# Altium PCB ignatova_telemetry_board.PcbDoc (part 1 of 2)
Units mm, origin at the board's own origin, x right, y up, seen from the top; angles counter-clockwise.
Board outline 105.78 x 126.4 mm, 4 copper layers (Top Layer, Signal Layer 1, Signal Layer 2, Bottom Layer), stack 1.556 mm thick; 56 components, 51 nets, 286 pads, 699 vias.
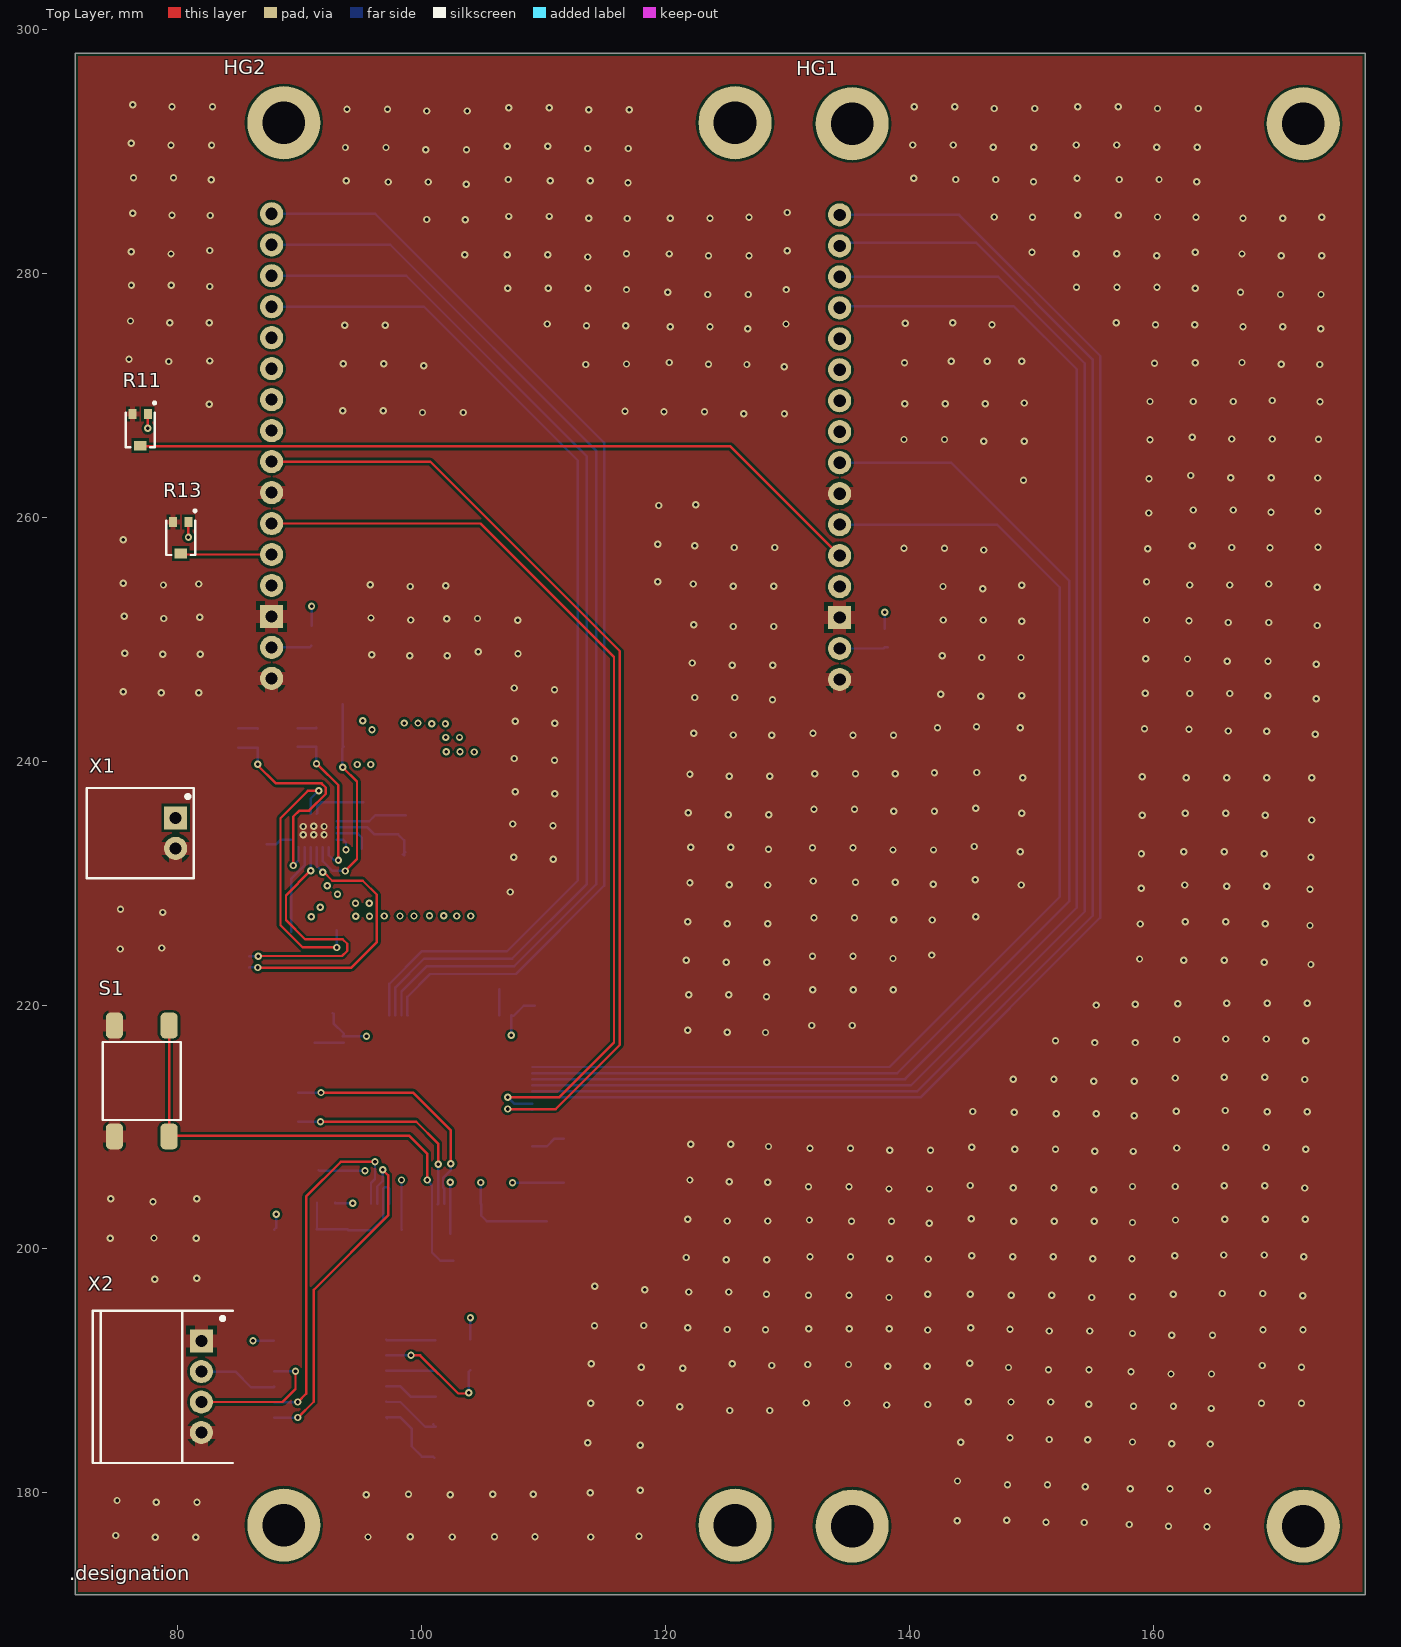
[diagram p0: Top Layer view]
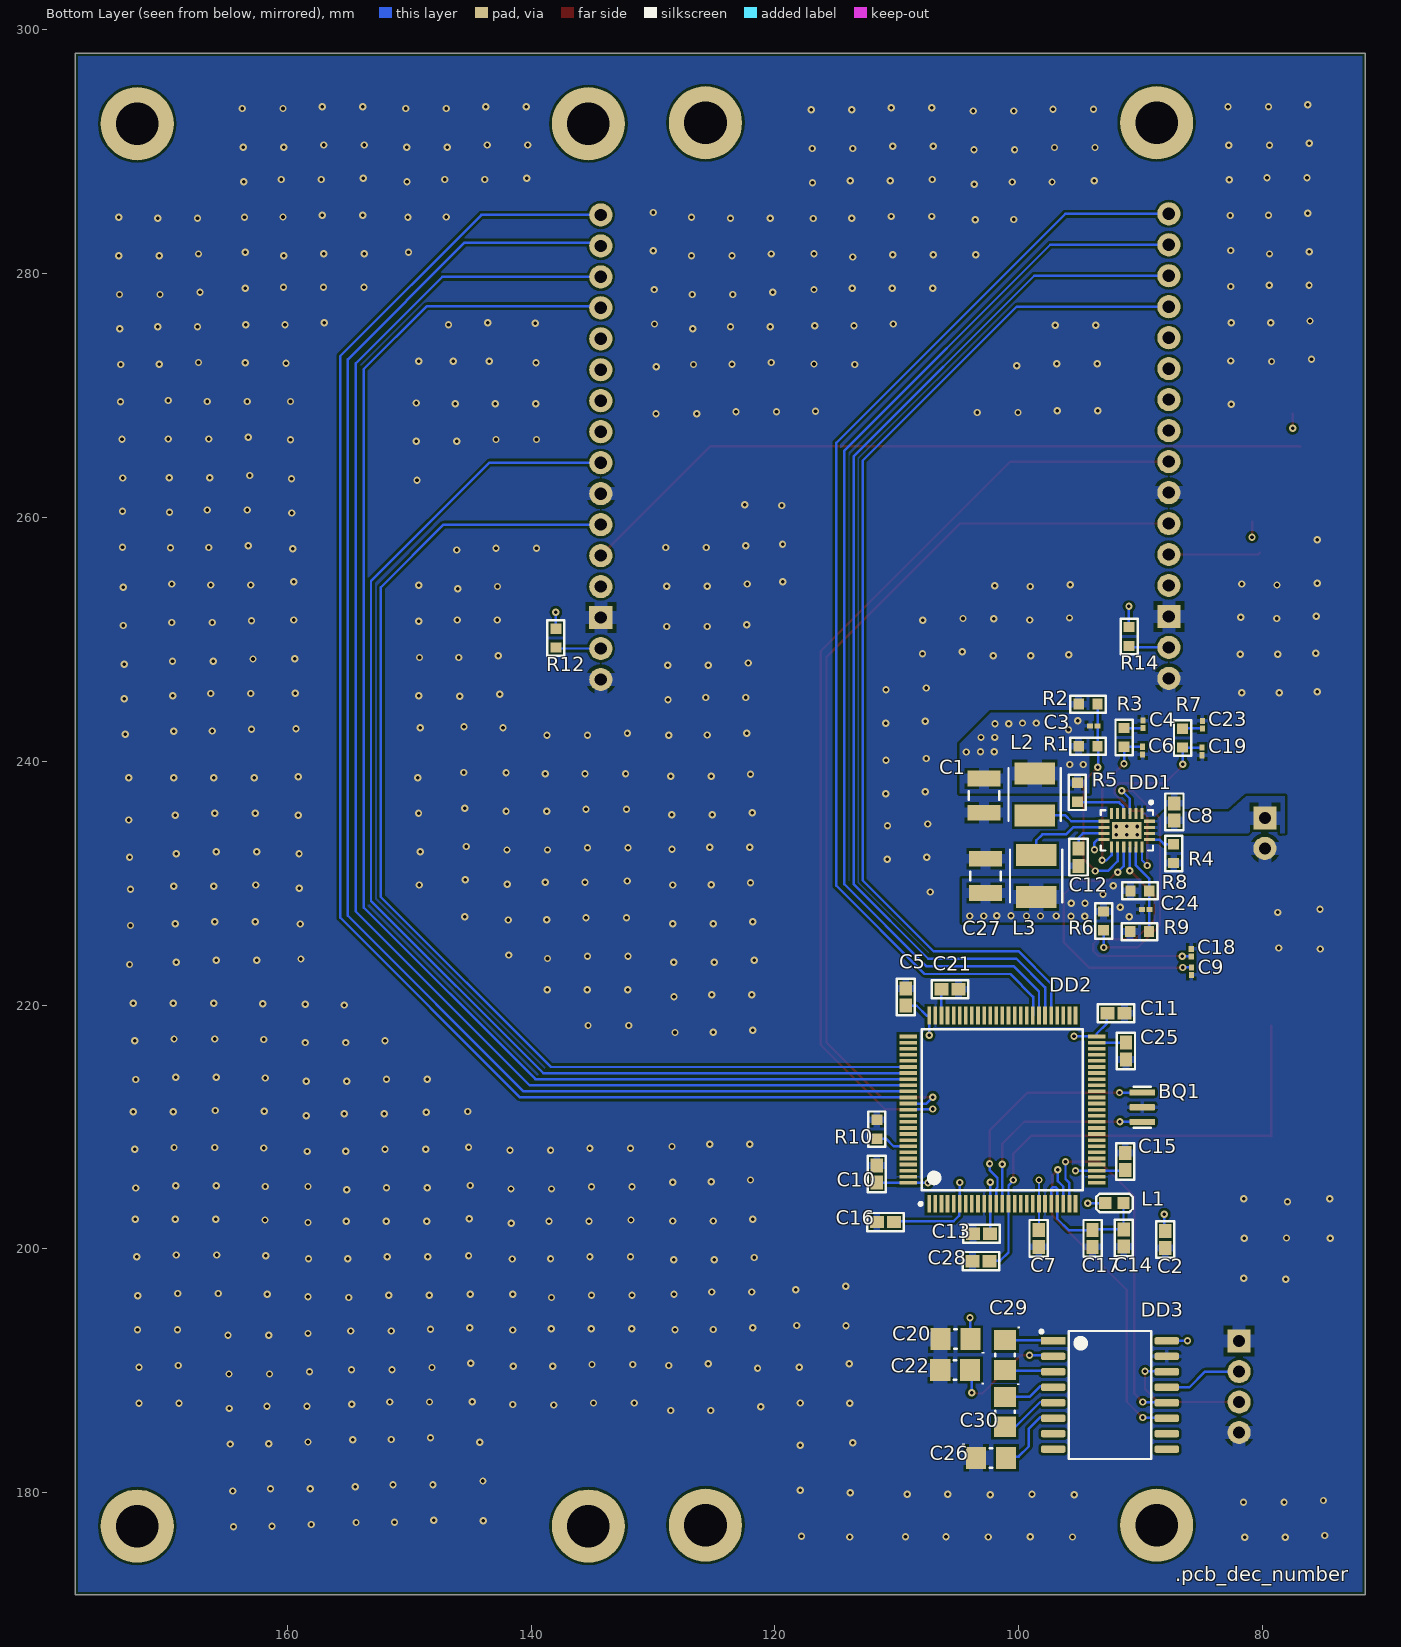
[diagram p1: Bottom Layer view, seen from below]
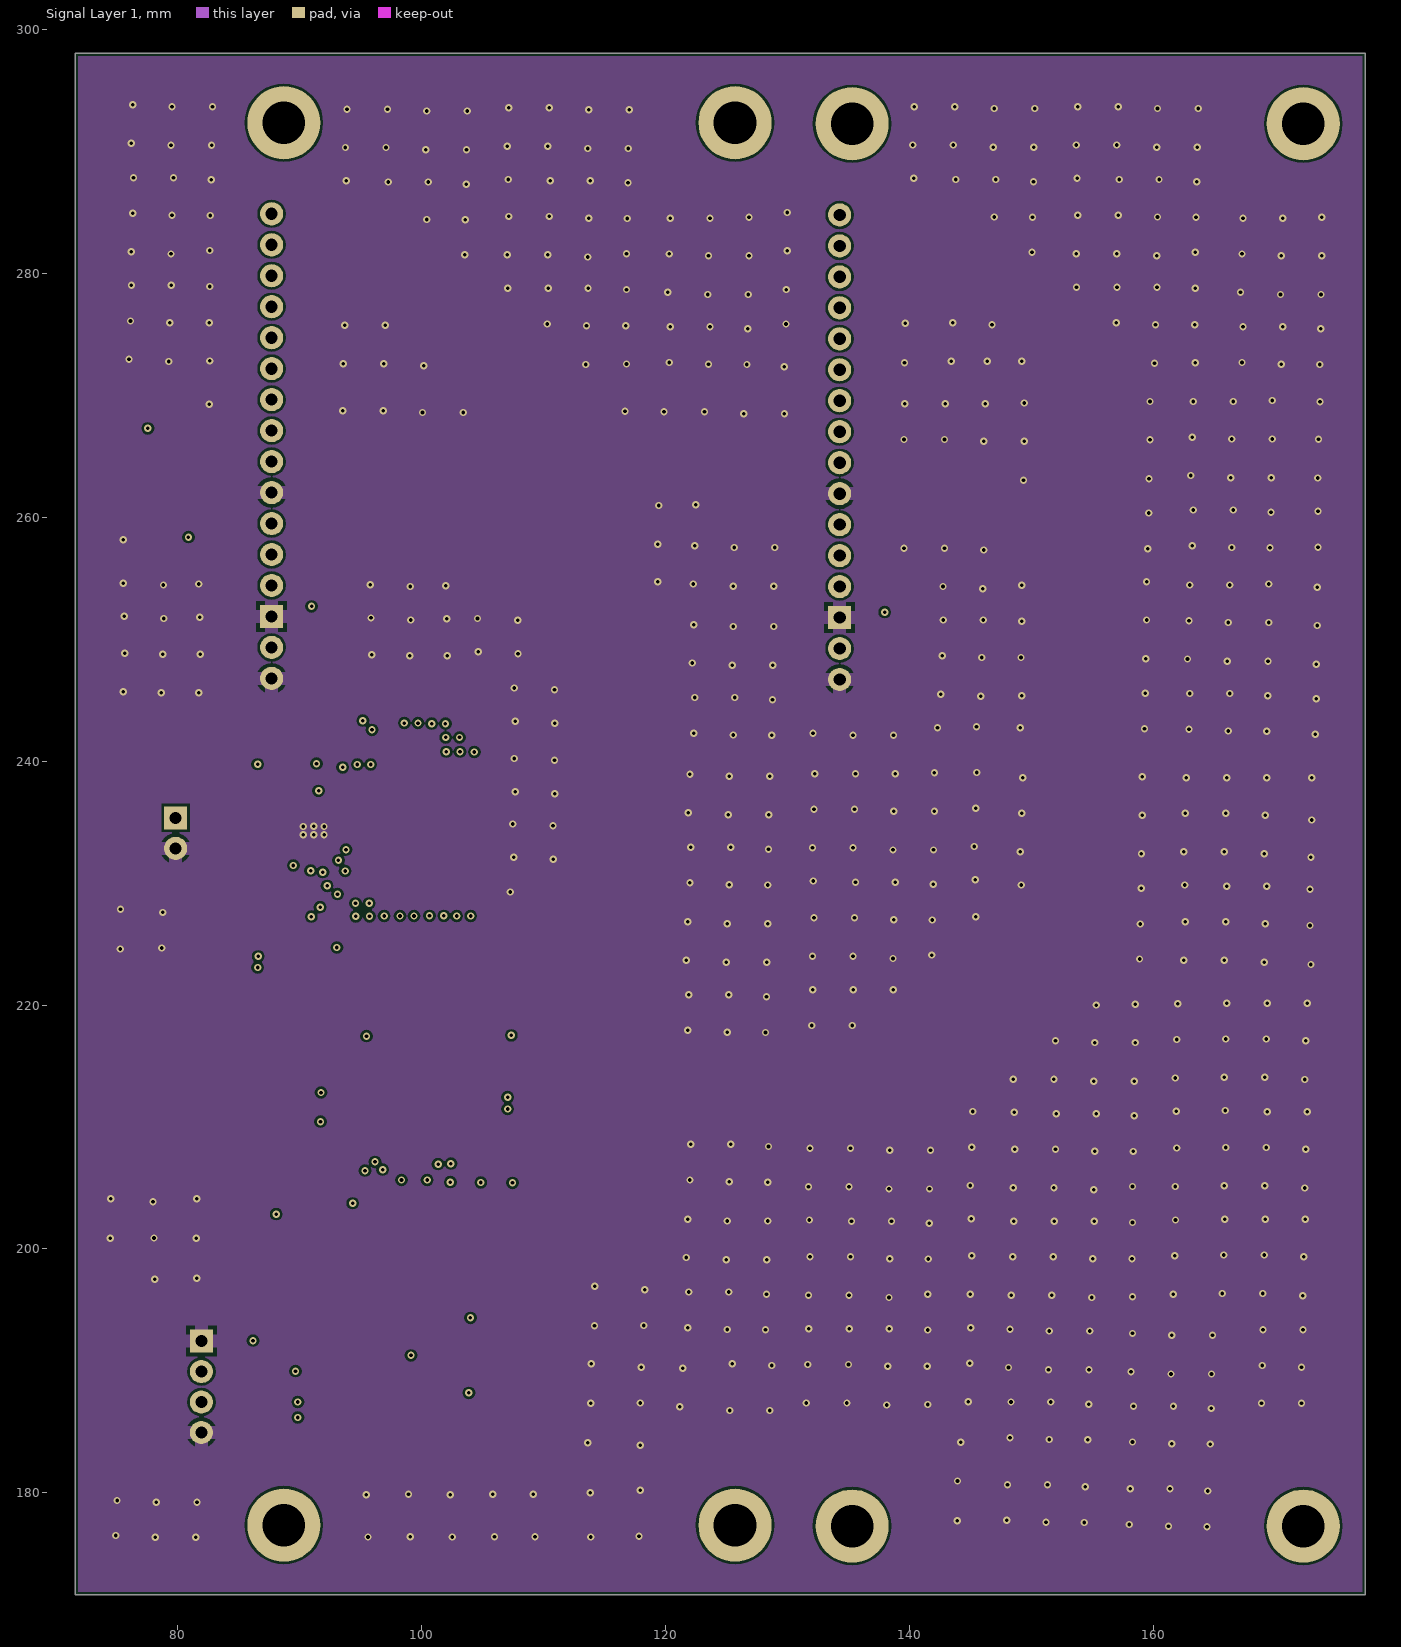
[diagram p2: Signal Layer 1]
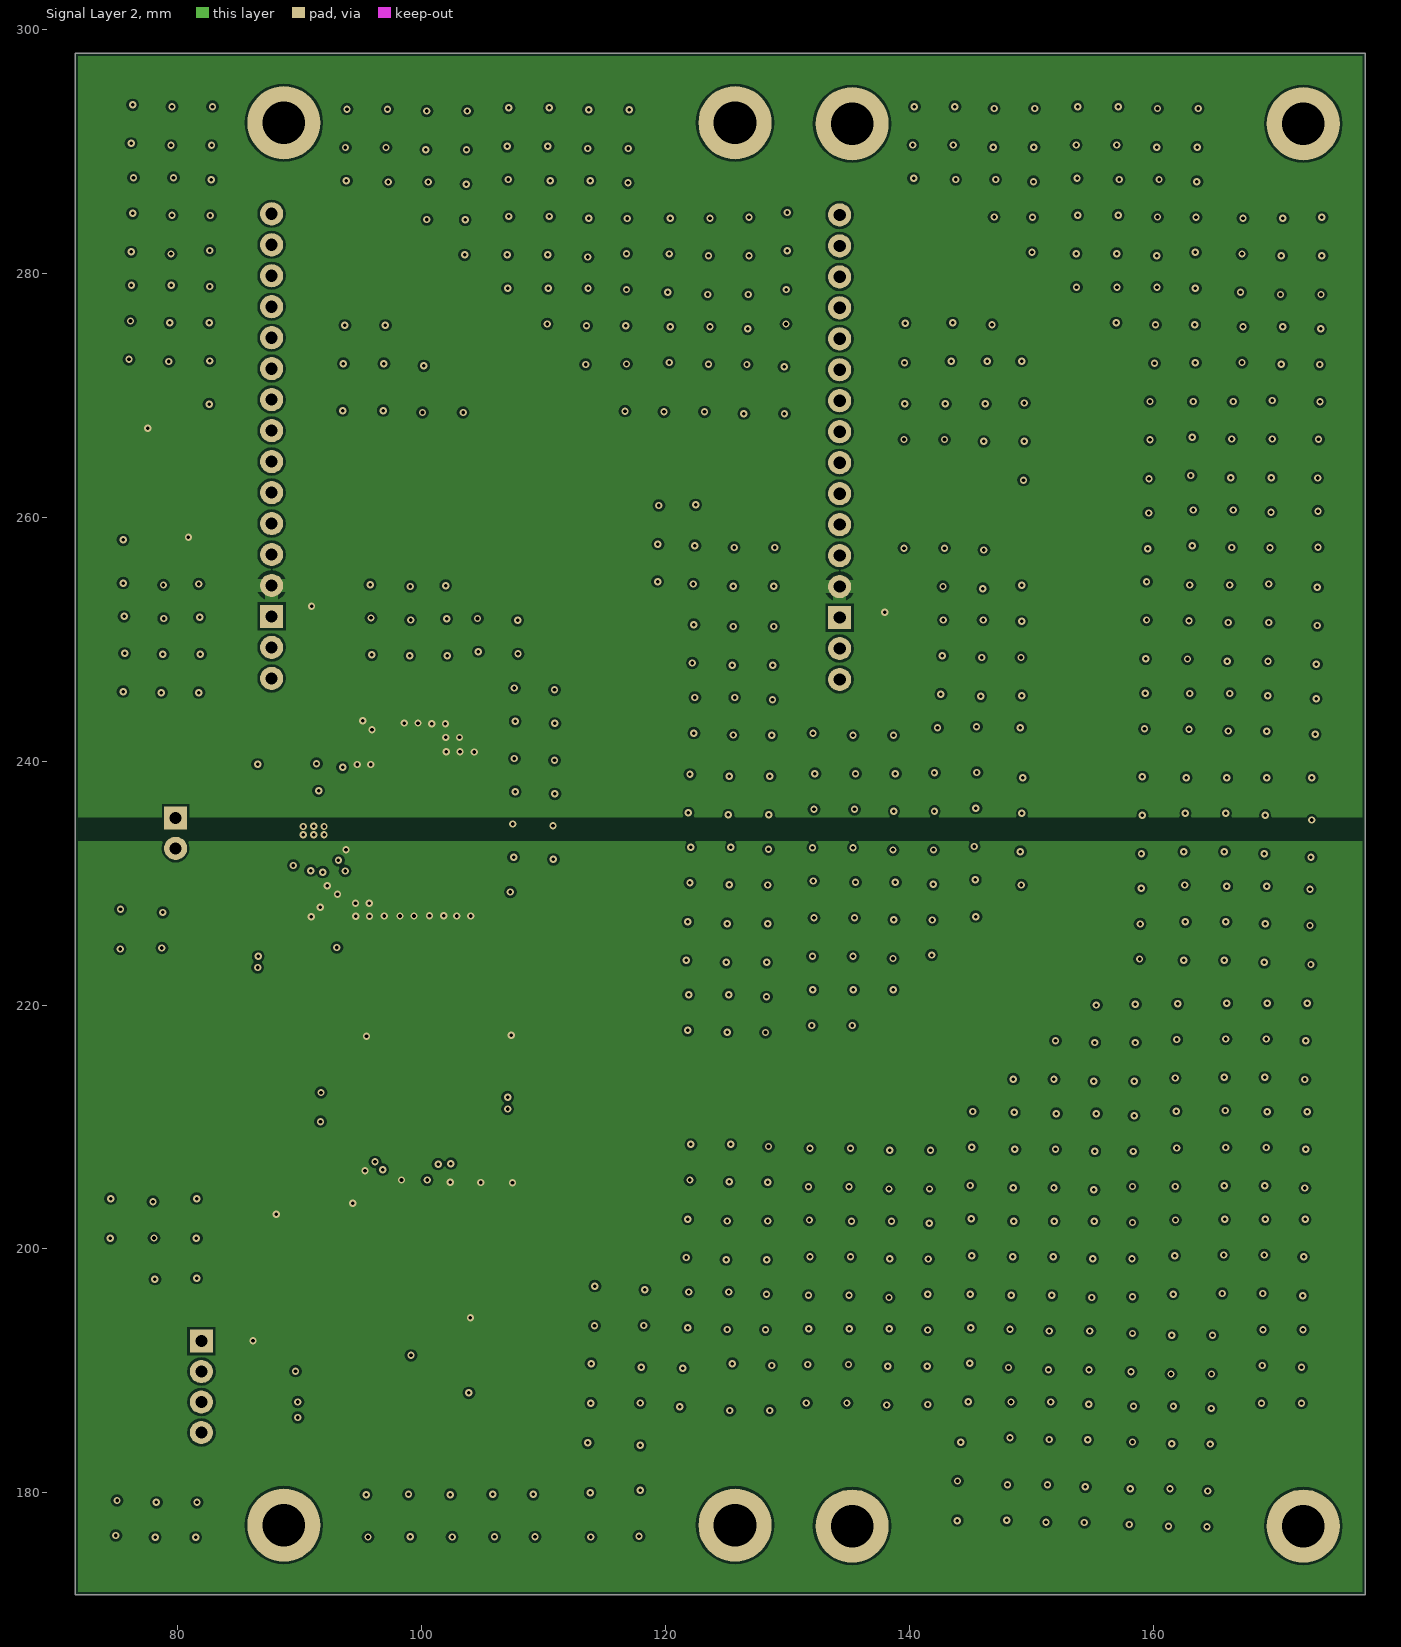
[diagram p3: Signal Layer 2]
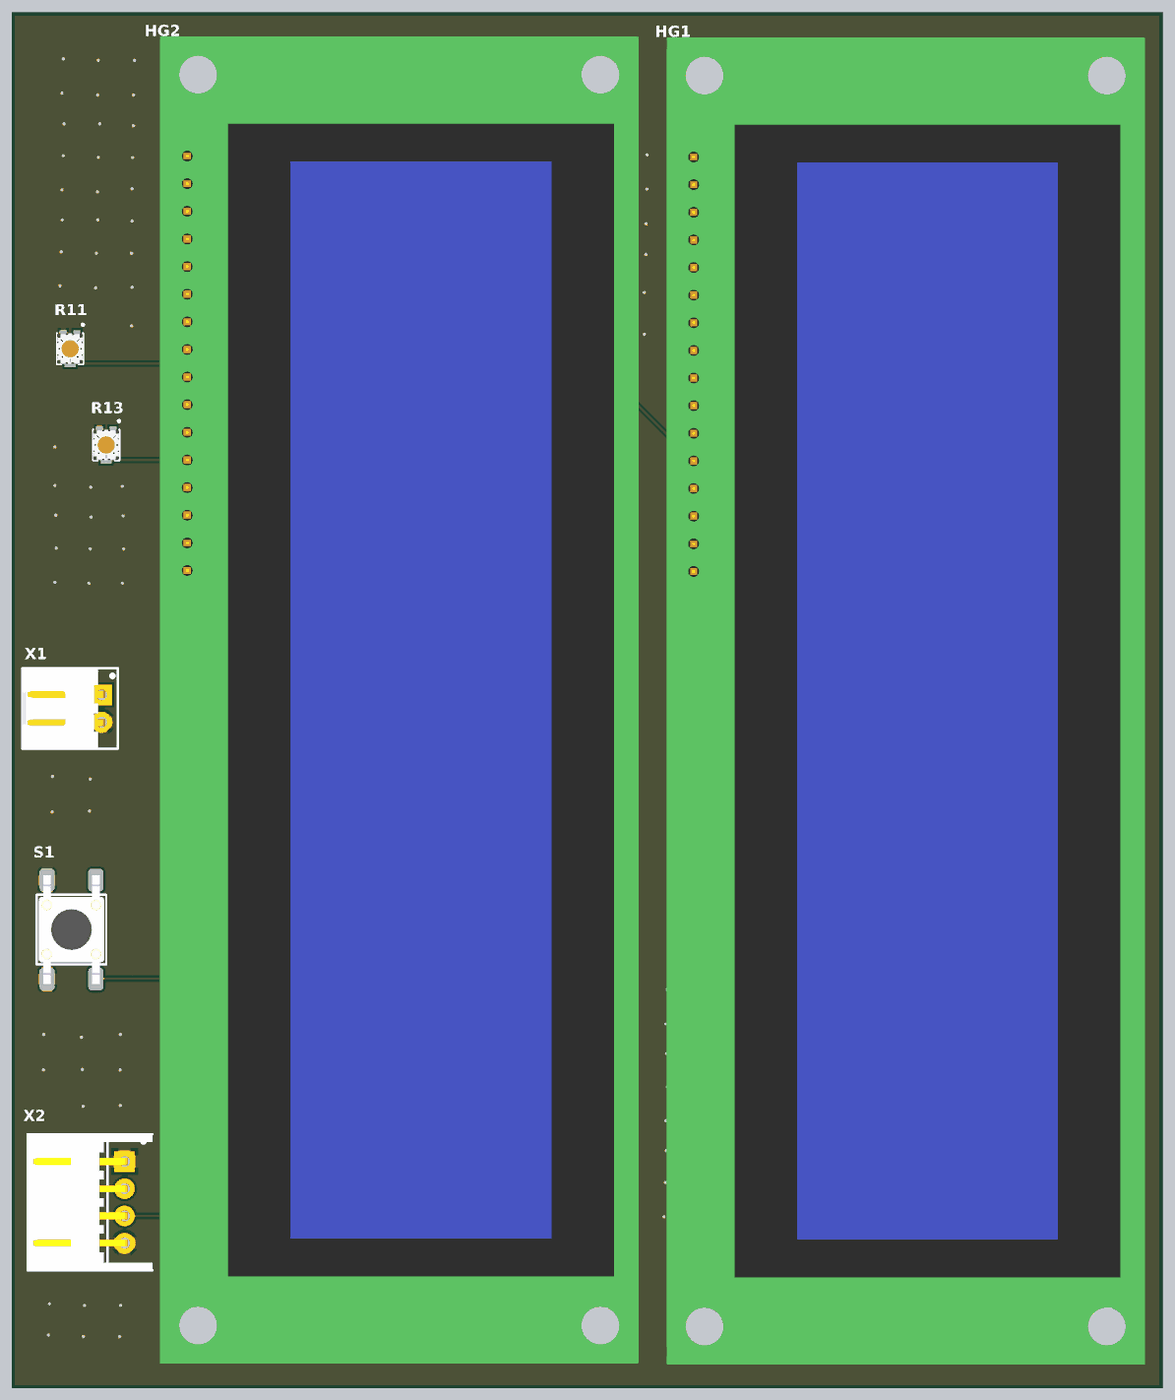
[diagram p4: 3D render of the assembled board from above, using the file's embedded part models]
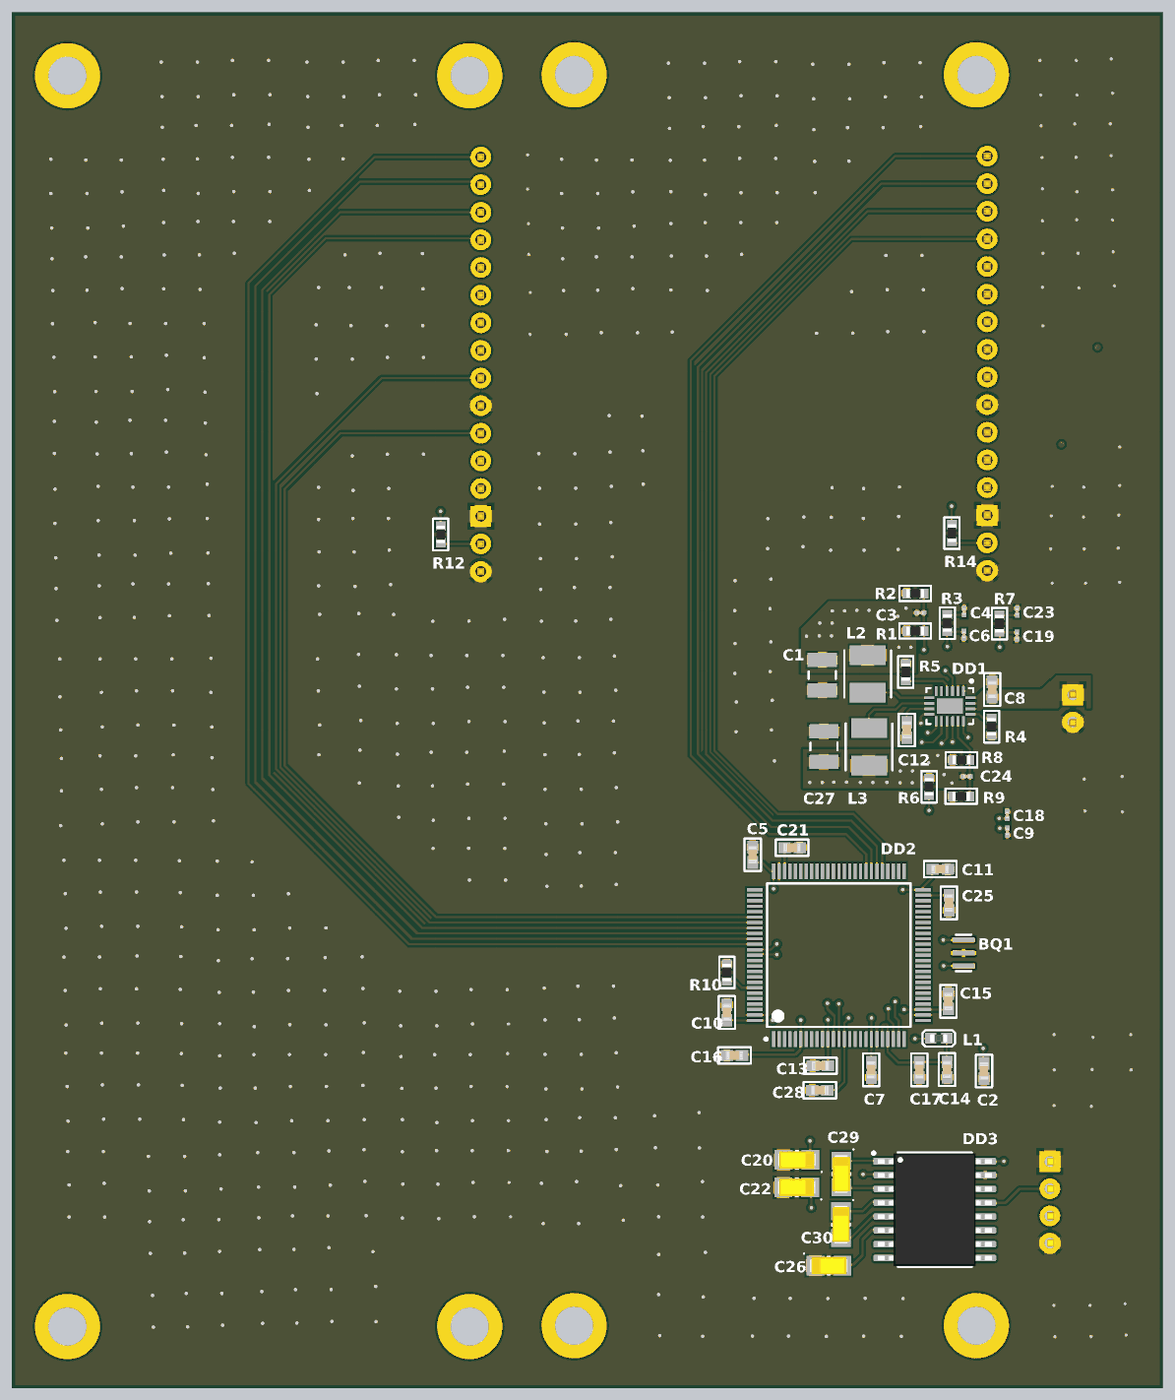
[diagram p5: 3D render of the assembled board from below, using the file's embedded part models]

## Layer stack, top to bottom
Top Solder: solder mask 0.0102, Solder Resist, Dk 3.5
Top Layer: signal copper 0.035
Prepreg 1: prepreg 0.125, FR4 HiTg170, Dk 5.07
Signal Layer 1: signal copper 0.018
Core 1: core 1.2, FR4, Dk 4.6
Signal Layer 2: signal copper 0.018
Prepreg 2: prepreg 0.125, FR4 HiTg170, Dk 5.07
Bottom Layer: signal copper 0.035
Bottom Solder: solder mask 0.0102, Solder Resist, Dk 3.5

## Board outline
71.6,171.65 71.6,298.05 177.375,298.05 177.375,171.65

## Design rules (kind name [scope] priority, off if disabled: settings)
AcuteAngle min_acute_angle [OnCopper] p1: minimum=3.50000000000000E+0001 checktracksonly=FALSE // Минимальный угол между примитивами топологии
BoardOutlineClearance board_outline_clearance_std [NOT (OnLayer('Bottom Overlay') OR OnLayer('Top Overlay'))] p1: gap=0.25 ignorepadtopadclearanceinfootprint=FALSE except(0: Arc-SplitContinuation Track-SplitContinuation SMDPad-SplitContinuation THPad-SplitContinuation Via-SplitContinuation Fill-SplitContinuation Poly-SplitContinuation Region-SplitContinuation Text-SplitContinuation) // Отступ элементов топологии от края фрезеруемой печатной платы
Clearance clearance_outer_35um_std [OnTopLayer OR OnBottomLayer] p1: gap=0.2 ignorepadtopadclearanceinfootprint=TRUE except(0.25: Arc-Hole Track-Hole SMDPad-Hole THPad-Hole Via-Hole Fill-Hole Poly-Hole Region-Hole Text-Hole) // Зазоры на внешних слоях
Clearance clearance_inner_35um_std [NOT (OnTopLayer Or OnBottomLayer)] p2: gap=0.2 ignorepadtopadclearanceinfootprint=FALSE except(0.25: Arc-Hole Track-Hole SMDPad-Hole THPad-Hole Via-Hole Fill-Hole Poly-Hole Region-Hole Text-Hole) // Зазоры на внутренних слоях
ComponentClearance [All] p1: gap=0 collisioncheckmode=3 verticalgap=0 showdistances=FALSE
DiffPairsRouting diff_pairs_routing [All] p1: maxlimit=0.254 minlimit=0.127 mostfreqgap=0.254 toplayer_maxgap=0.127 toplayer_prefgap=0.127 toplayer_minwidth=0.143 toplayer_maxwidth=0.143 toplayer_prefwidth=0.143 midlayer1_minwidth=0.381 midlayer1_maxwidth=0.381 midlayer1_prefwidth=0.381 midlayer2_minwidth=0.381 midlayer2_maxwidth=0.381 midlayer2_prefwidth=0.381 bottomlayer_maxgap=0.127 bottomlayer_prefgap=0.127 bottomlayer_minwidth=0.143 bottomlayer_maxwidth=0.143 bottomlayer_prefwidth=0.143 impedanceprofiledriven=TRUE impedanceprofileid={FD46899E-B5A2-4EF5-A302-5D2DB6A51F35} maxuncoupledlength=12.7 // Правила трассировки дифференциальных пар
HoleSize min_hole_size_std [IsPad] p1: absolutevalues=TRUE maxlimit=5.9 minlimit=0.6 maxpercent=80.000 minpercent=20.000 // Диаметр межслойного переходного отверстия
HoleSize min_hole_size_via_std [IsVia] p2: absolutevalues=TRUE maxlimit=5.9 minlimit=0.3 maxpercent=80.000 minpercent=20.000 // Минимальный диаметр монтажного отверстия
HoleToHoleClearance hole_to_hole_clearance_std [All] p1: gap=0.2 allowstackedmicrovias=FALSE // Минимальное расстояние между краями двух отверстий
MinimumAnnularRing min_via_ar_std [All] p1: minimumring=0.15 // Поясок площадки переходного отверстия (Annular ring VIA)
MinimumAnnularRing min_pad_ar_std [All] p2: minimumring=0.2 // Поясок монтажной контактной площадки (Annular ring PAD)
MinimumSolderMaskSliver min_solder_mask_bridge_std [All] p1: minsoldermaskwidth=0.15 // Мнимальная ширина масочного мостика
PlaneClearance plane_clearance_35um_std [All] p1: clearance=0.2 // Отступ полигона (для слоя plane) от элементов топологии
PlaneConnect [All] p1: planeconnectstyle=Relief reliefexpansion=0.5 reliefentries=4 reliefconductorwidth=0.2 reliefairgap=0.2
PolygonConnect poly_connect_to_pad<=0.3 [(AsMM(PadXSize_AllLayers)<=0.301) or (AsMM(PadYSize_AllLayers)<=0.301)] p1: thpad.connectstyle=Relief thpad.reliefconductorwidth=0.2 thpad.reliefentries=4 thpad.polygonreliefangle="90 Angle" thpad.airgapwidth=0.2 smdpad.connectstyle=Relief smdpad.reliefconductorwidth=0.2 smdpad.reliefentries=4 smdpad.polygonreliefangle="90 Angle" smdpad.airgapwidth=0.2 via.connectstyle=Direct via.reliefconductorwidth=0.254 via.reliefentries=4 via.polygonreliefangle="90 Angle" via.airgapwidth=0.254 // Правила подключения полигонов для падов от 0,3мм и меньше
PolygonConnect poly_connect_to_pad<=0.4 [(AsMM(PadXSize_AllLayers)<=0.401) or (AsMM(PadYSize_AllLayers)<=0.401)] p2: thpad.connectstyle=Relief thpad.reliefconductorwidth=0.26 thpad.reliefentries=4 thpad.polygonreliefangle="90 Angle" thpad.airgapwidth=0.2 smdpad.connectstyle=Relief smdpad.reliefconductorwidth=0.26 smdpad.reliefentries=4 smdpad.polygonreliefangle="90 Angle" smdpad.airgapwidth=0.2 via.connectstyle=Direct via.reliefconductorwidth=0.254 via.reliefentries=4 via.polygonreliefangle="90 Angle" via.airgapwidth=0.254 // Правила подключения полигонов для падов от 0,4 и меньше
PolygonConnect poly_connect_to_pad<=0.6 [(AsMM(PadXSize_AllLayers)<=0.601) or (AsMM(PadYSize_AllLayers)<=0.601)] p3: thpad.connectstyle=Relief thpad.reliefconductorwidth=0.33 thpad.reliefentries=4 thpad.polygonreliefangle="90 Angle" thpad.airgapwidth=0.2 smdpad.connectstyle=Relief smdpad.reliefconductorwidth=0.33 smdpad.reliefentries=4 smdpad.polygonreliefangle="90 Angle" smdpad.airgapwidth=0.2 via.connectstyle=Direct via.reliefconductorwidth=0.254 via.reliefentries=4 via.polygonreliefangle="90 Angle" via.airgapwidth=0.254 // Правила подключения полигонов для падов от 0,6мм и меньше
PolygonConnect poly_connect_to_pad<=0.7 [(AsMM(PadXSize_AllLayers)<=0.701) or (AsMM(PadYSize_AllLayers)<=0.701)] p4: thpad.connectstyle=Relief thpad.reliefconductorwidth=0.46 thpad.reliefentries=4 thpad.polygonreliefangle="90 Angle" thpad.airgapwidth=0.2 smdpad.connectstyle=Relief smdpad.reliefconductorwidth=0.46 smdpad.reliefentries=4 smdpad.polygonreliefangle="90 Angle" smdpad.airgapwidth=0.2 via.connectstyle=Direct via.reliefconductorwidth=0.254 via.reliefentries=4 via.polygonreliefangle="90 Angle" via.airgapwidth=0.254 // Правила подключения полигонов для падов от 0,7мм и меньше
PolygonConnect poly_connect_to_pad<=0.8 [(AsMM(PadXSize_AllLayers)<=0.8)or(AsMM(PadYSize_AllLayers)<=0.8)] p5: thpad.connectstyle=Relief thpad.reliefconductorwidth=0.53 thpad.reliefentries=4 thpad.polygonreliefangle="90 Angle" thpad.airgapwidth=0.3 smdpad.connectstyle=Relief smdpad.reliefconductorwidth=0.53 smdpad.reliefentries=4 smdpad.polygonreliefangle="90 Angle" smdpad.airgapwidth=0.2 via.connectstyle=Direct via.reliefconductorwidth=0.254 via.reliefentries=4 via.polygonreliefangle="90 Angle" via.airgapwidth=0.254 // Правила подключения полигонов для падов от 0,8мм и меньше
PolygonConnect poly_connect_to_pad<=1 [(AsMM(PadXSize_AllLayers)<=1.01)or(AsMM(PadYSize_AllLayers)<=1.01)] p6: thpad.connectstyle=Relief thpad.reliefconductorwidth=0.6 thpad.reliefentries=4 thpad.polygonreliefangle="90 Angle" thpad.airgapwidth=0.3 smdpad.connectstyle=Relief smdpad.reliefconductorwidth=0.6 smdpad.reliefentries=4 smdpad.polygonreliefangle="90 Angle" smdpad.airgapwidth=0.2 via.connectstyle=Direct via.reliefconductorwidth=0.254 via.reliefentries=4 via.polygonreliefangle="90 Angle" via.airgapwidth=0.254 // Правила подключения полигонов для падов от 1мм и меньше
PolygonConnect poly_connect_to_pad<=1.3 [(AsMM(PadXSize_AllLayers)<=1.31)or(AsMM(PadYSize_AllLayers)<=1.31)] p7: thpad.connectstyle=Relief thpad.reliefconductorwidth=0.66 thpad.reliefentries=4 thpad.polygonreliefangle="90 Angle" thpad.airgapwidth=0.3 smdpad.connectstyle=Relief smdpad.reliefconductorwidth=0.86 smdpad.reliefentries=4 smdpad.polygonreliefangle="90 Angle" smdpad.airgapwidth=0.2 via.connectstyle=Direct via.reliefconductorwidth=0.254 via.reliefentries=4 via.polygonreliefangle="90 Angle" via.airgapwidth=0.254 // Правила подключения полигонов для падов от 1,3мм и меньше
PolygonConnect poly_connect_to_pad<=1.6 [(AsMM(PadXSize_AllLayers)<=1.61)or(AsMM(PadYSize_AllLayers)<=1.61)] p8: thpad.connectstyle=Relief thpad.reliefconductorwidth=0.8 thpad.reliefentries=4 thpad.polygonreliefangle="90 Angle" thpad.airgapwidth=0.3 smdpad.connectstyle=Relief smdpad.reliefconductorwidth=1 smdpad.reliefentries=4 smdpad.polygonreliefangle="90 Angle" smdpad.airgapwidth=0.2 via.connectstyle=Direct via.reliefconductorwidth=0.254 via.reliefentries=4 via.polygonreliefangle="90 Angle" via.airgapwidth=0.254 // Правила подключения полигонов для падов от 1,6мм и меньше
PolygonConnect poly_connect_to_pad<=1.8 [(AsMM(PadXSize_AllLayers)<=1.8)or(AsMM(PadYSize_AllLayers)<=1.8)] p9: thpad.connectstyle=Relief thpad.reliefconductorwidth=1 thpad.reliefentries=4 thpad.polygonreliefangle="90 Angle" thpad.airgapwidth=0.3 smdpad.connectstyle=Relief smdpad.reliefconductorwidth=1.2 smdpad.reliefentries=4 smdpad.polygonreliefangle="90 Angle" smdpad.airgapwidth=0.2 via.connectstyle=Direct via.reliefconductorwidth=0.254 via.reliefentries=4 via.polygonreliefangle="90 Angle" via.airgapwidth=0.254 // Правила подключения полигонов для падов от 1,8мм и меньше
PolygonConnect poly_connect_to_pad<=2 [(AsMM(PadXSize_AllLayers)<=2.01)or(AsMM(PadYSize_AllLayers)<=2.01)] p10: thpad.connectstyle=Relief thpad.reliefconductorwidth=1.1 thpad.reliefentries=4 thpad.polygonreliefangle="90 Angle" thpad.airgapwidth=0.3 smdpad.connectstyle=Relief smdpad.reliefconductorwidth=1.4 smdpad.reliefentries=4 smdpad.polygonreliefangle="90 Angle" smdpad.airgapwidth=0.2 via.connectstyle=Direct via.reliefconductorwidth=0.254 via.reliefentries=4 via.polygonreliefangle="90 Angle" via.airgapwidth=0.254 // Правила подключения полигонов для падов от 2мм и меньше
PolygonConnect poly_connect_to_pad<=2.3 [(AsMM(PadXSize_AllLayers)<=2.31)or(AsMM(PadYSize_AllLayers)<=2.31)] p11: thpad.connectstyle=Relief thpad.reliefconductorwidth=1.2 thpad.reliefentries=4 thpad.polygonreliefangle="90 Angle" thpad.airgapwidth=0.3 smdpad.connectstyle=Relief smdpad.reliefconductorwidth=1.4 smdpad.reliefentries=4 smdpad.polygonreliefangle="90 Angle" smdpad.airgapwidth=0.2 via.connectstyle=Direct via.reliefconductorwidth=0.254 via.reliefentries=4 via.polygonreliefangle="90 Angle" via.airgapwidth=0.254 // Правила подключения полигонов для падов от 2,3мм и меньше
PolygonConnect poly_connect_to_pad<=2.5 [(AsMM(PadXSize_AllLayers)<=2.51)or(AsMM(PadYSize_AllLayers)<=2.51)] p12: thpad.connectstyle=Relief thpad.reliefconductorwidth=1.2 thpad.reliefentries=4 thpad.polygonreliefangle="90 Angle" thpad.airgapwidth=0.3 smdpad.connectstyle=Relief smdpad.reliefconductorwidth=1.4 smdpad.reliefentries=4 smdpad.polygonreliefangle="90 Angle" smdpad.airgapwidth=0.2 via.connectstyle=Direct via.reliefconductorwidth=0.254 via.reliefentries=4 via.polygonreliefangle="90 Angle" via.airgapwidth=0.254 // Правила подключения полигонов для падов от 2,5мм и меньше
PolygonConnect poly_connect_to_pad<=2.7 [(AsMM(PadXSize_AllLayers)<=2.71)or(AsMM(PadYSize_AllLayers)<=2.71)] p13: thpad.connectstyle=Relief thpad.reliefconductorwidth=1.4 thpad.reliefentries=4 thpad.polygonreliefangle="90 Angle" thpad.airgapwidth=0.3 smdpad.connectstyle=Relief smdpad.reliefconductorwidth=1.6 smdpad.reliefentries=4 smdpad.polygonreliefangle="90 Angle" smdpad.airgapwidth=0.2 via.connectstyle=Direct via.reliefconductorwidth=0.254 via.reliefentries=4 via.polygonreliefangle="90 Angle" via.airgapwidth=0.254 // Правила подключения полигонов для падов от 2,7мм и меньше
PolygonConnect poly_connect_to_pad<=3 [(AsMM(PadXSize_AllLayers)<=3.01)or(AsMM(PadYSize_AllLayers)<=3.01)] p14: thpad.connectstyle=Relief thpad.reliefconductorwidth=1.6 thpad.reliefentries=4 thpad.polygonreliefangle="90 Angle" thpad.airgapwidth=0.3 smdpad.connectstyle=Relief smdpad.reliefconductorwidth=1.8 smdpad.reliefentries=4 smdpad.polygonreliefangle="90 Angle" smdpad.airgapwidth=0.2 via.connectstyle=Direct via.reliefconductorwidth=0.254 via.reliefentries=4 via.polygonreliefangle="90 Angle" via.airgapwidth=0.254 // Правила подключения полигонов для падов от 3мм и меньше
PolygonConnect poly_connect_to_pad<=7 [(AsMM(PadXSize_AllLayers)<7.01)or(AsMM(PadYSize_AllLayers)<=7.01)] p15: thpad.connectstyle=Relief thpad.reliefconductorwidth=2 thpad.reliefentries=4 thpad.polygonreliefangle="90 Angle" thpad.airgapwidth=0.4 smdpad.connectstyle=Relief smdpad.reliefconductorwidth=2 smdpad.reliefentries=4 smdpad.polygonreliefangle="90 Angle" smdpad.airgapwidth=0.3 via.connectstyle=Direct via.reliefconductorwidth=0.254 via.reliefentries=4 via.polygonreliefangle="90 Angle" via.airgapwidth=0.254 // Правила подключения полигонов для падов от 7мм и меньше
PolygonConnect poly_connect_to_pad [All] p16: thpad.connectstyle=Relief thpad.reliefconductorwidth=0.25 thpad.reliefentries=4 thpad.polygonreliefangle="90 Angle" thpad.airgapwidth=0.2 smdpad.connectstyle=Relief smdpad.reliefconductorwidth=0.25 smdpad.reliefentries=4 smdpad.polygonreliefangle="90 Angle" smdpad.airgapwidth=0.2 via.connectstyle=Direct via.reliefconductorwidth=0.25 via.reliefentries=4 via.polygonreliefangle="90 Angle" via.airgapwidth=0.2 // Правила подключения полигонов общие
RoutingCorners [All] p1 off: cornerstyle=45-Degree minsetback=2.5 maxsetback=2.5
RoutingVias [All] p1: holewidth=0.3 width=0.6 viastyle="Through Hole" minholewidth=0.3 minwidth=0.6 maxholewidth=5.9 maxwidth=6.4
SilkToSilkClearance silk_to_silk_clearance_std [All] p1 off: silktosilkclearance=0.15 // Отступ текста шелкографии от других примитивов шелкографии
SilkToSolderMaskClearance silk_to_solder_mask_clearance_std [IsPad] p1 off: minsilkscreentomaskgap=0.15 clearancetoexposedcopper=FALSE // Минимальное расстояние между элементами шелкографии и вскрытой медью
SolderMaskExpansion solder_mask_expansion_std [All] p1: expansion=0.05 // Припуск паяльной масски
UnRoutedNet [All] p1: checkbadconnections=TRUE
Width width_35um_std [All] p1: maxlimit=10 minlimit=0.2 preferedwidth=0.2 checkconnectedcopper=TRUE // Ширина проводников (общая)
19 further rules are at their usual default settings.

## Components (designator, comment, footprint, x,y, rotation, side; value= is the part's Value field where it differs from the comment)
BQ1 "CSTNE8M00G520000R0" CSTNE-3-320X130X70 89.875,211.625 r0 bottom
C1 "47 мк" C1210 102.875,237.175 r270 bottom
C2 "4,7 мк" C0603 88,200.775 r90 bottom
C3 "4,7 п" C0201 93.85,242.9 r180 bottom
C4 "470 п" C0201 89.825,243.025 r90 bottom
C5 "0,1 мк" C0603 109.275,220.65 r270 bottom
C6 "4,7 п" C0201 89.85,240.875 r270 bottom
C7 "0,1 мк" C0603 98.375,200.875 r90 bottom
C8 "4,7 мк" C0603 87.25,235.85 r90 bottom
C9 "0,01 мк" C0201 85.85,222.785 r270 bottom
C10 "0,1 мк" C0603 111.65,206.15 r270 bottom
C11 "0,1 мк" C0603 92.025,219.325 r0 bottom
C12 "1 мк" C0603 95.1,232.125 r270 bottom
C13 "0,1 мк" C0603 103.05,201.25 r180 bottom
C14 "1 мк" C0603 91.4,200.9 r90 bottom
C15 "0,1 мк" C0603 91.275,207.175 r270 bottom
C16 "1 мк" C0603 110.95,202.2 r0 bottom
C17 "0,1 мк" C0603 93.95,200.875 r270 bottom
C18 "0,01 мк" C0201 85.865,224.3 r90 bottom
C19 "4,7 п" C0201 84.975,240.8 r270 bottom
C20 "0,1 мк" C1206POLAR 105.2,192.6 r0 bottom
C21 "2,2 мк" C0603 105.65,221.3 r180 bottom
C22 "0,1 мк" C1206POLAR 105.225,190.075 r0 bottom
C23 "470 п" C0201 84.95,243 r90 bottom
C24 "4,7 п" C0201 89.6,227.85 r180 bottom
C25 "2,2 мк" C0603 91.225,216.225 r270 bottom
C26 "0,1 мк" C1206POLAR 102.275,182.875 r180 bottom
C27 "100 мк" C1210 102.725,230.6 r90 bottom
C28 "0,1 мк" C0603 103.1,199 r180 bottom
C29 "0,1 мк" C1206POLAR 101.125,191.3 r270 bottom
C30 "0,1 мк" C1206POLAR 101.15,186.65 r270 bottom
DD1 "LT8653S" LQFN-20 91.15,234.325 r270 bottom
DD2 "STM32F429VIT6" LQFP-100 101.35,211.425 r90 bottom
DD3 "MAX3232CDR" SOIC-16 92.525,188.025 r180 bottom
HG1 "JHD162G" LCD-16x2 131.78,295.78 r270 top
HG2 "JHD162G" LCD-16x2 85.2,295.87 r270 top
L1 "FCM1608KF-601T05" BLM-2-0603 92.16,203.775 r180 bottom
L2 "XFL4020-222MEB" XFL-2-430X430X210 98.7,237.275 r270 bottom
L3 "XFL4020-222MEB" XFL-2-430X430X210 98.575,230.575 r270 bottom
R1 "1 М" R0603 94.325,241.225 r0 bottom
R2 "191 к" R0603 94.325,244.675 r180 bottom
R3 "22,1 к" R0603 91.375,241.95 r270 bottom
R4 "15 к" R0603 87.3,232.425 r90 bottom
R5 "100 к" R0603 95.2,237.45 r270 bottom
R6 "100 к" R0603 93.05,226.9 r90 bottom
R7 "34,8 к" R0603 86.575,241.9 r90 bottom
R8 "1 М" R0603 90.075,229.375 r0 bottom
R9 "316 к" R0603 90.1,226.025 r180 bottom
R10 "10 к" R0603 111.65,209.825 r270 bottom
R11 "10 k" TRIMMER-RESISTOR 76.925,267.175 r270 top
R12 "330" R0603 137.975,250.1 r270 bottom
R13 "10 k" TRIMMER-RESISTOR 80.25,258.325 r270 top
R14 "330" R0603 90.95,250.225 r270 bottom
S1 "FSM4JSMA" FSM4JSMA 77.05,213.775 r90 top
X1 "DS1029-2-MRW6XB" DS1029-2-MRW6XB 76.675,234.1 r270 top
X2 "DS1069-4MRW6XA" DS1069-4MRW6XA 78.775,188.7 r270 top

## Footprints (in the part's own frame and the unit in brackets; to place one, negate y for a bottom-side part, rotate by r counter-clockwise, add the part's x,y. Pads: shape width x height; smd on the part's side, far side on the other; paste and mask are expansions set on the pad)
BLM-2-0603 [mm] "Chip Inductor, 2-Leads, Body 1,60x0,80mm, IPC Medium Density"
  rect 1.02x0.98 smd: 1(-0.74,0) 2(0.74,0)
  silkscreen extent -1.5,-0.75 1.5,0.75, body extent -0.8,-0.38 0.8,0.37, height 0.8
C0201 [mm] "Chip Capacitor, 2-Leads, Body 0,60x0,30mm, IPC Medium Density"
  rect 0.5x0.42 smd: 1(-0.31,0) 2(0.31,0)
  body extent -0.3,-0.15 0.3,0.15, height 0.29
C0603 [mm] "Chip Capacitor, 2-Leads, Body 1,60x0,80mm, IPC Medium Density"
  rect 1.15x1 smd: 1(-0.7,0) 2(0.7,0)
  silkscreen extent -1.5,-0.75 1.5,0.75, body extent -0.8,-0.4 0.8,0.4, height 0.8
C1206POLAR [mm] "Chip Capacitor, 2-Leads, Body 3,20x1,60mm, IPC Medium Density"
  rect 1.65x1.8 smd: 1(-1.225,0) 2(1.225,0)
  silkscreen extent -2.31,-0.8 0.1,1.16, body extent -1.73,-0.8 1.73,0.8, height 1.65
C1210 [mm] "Chip Diode, 2-Leads, Body 3,20x2,50mm, IPC Medium Density"
  rect 1.3x2.7 smd: 1(-1.4,0) 2(1.4,0)
  silkscreen extent -0.35,-1.25 0.35,1.25, body extent -1.7,-1.35 1.7,1.35, height 0.85
CSTNE-3-320X130X70 [mm]
  rrect25% 2.1x0.5 smd paste-0.025 mask+0.1: 1(0,1.2) 2(0,0) 3(0,-1.2)
  silkscreen extent -0.7,-1.67 0.7,1.68, body extent -0.7,-1.68 0.7,1.67, height 0.75
DS1029-2-MRW6XB [mm]
  rect 1.9x1.9 hole 1: 1(-1.25,3.15)
  round 1.9 hole 1: 2(1.25,3.15)
  silkscreen extent -3.7,-4.15 3.7,4.65, body extent -3.7,-4.17 3.7,3.47, height 5.75
DS1069-4MRW6XA [mm] "CWF 4 Pins Plug Header, Pitch 2,5mm, R/A Type, Type A"
  rect 1.9x1.9 hole 1: 1(-3.75,3.164)
  round 1.9 hole 1: 2(-1.25,3.164) 3(1.25,3.164) 4(3.75,3.164)
  silkscreen extent -6.25,-5.76 6.25,5.74, body extent -6.25,-5.76 6.25,5.74, height 5.85
FSM4JSMA [mm]
  rrect50% 2.1x1.4 smd: 1(-4.55,2.24) 1(4.55,2.24) 2(-4.55,-2.24) 2(4.55,-2.24)
  silkscreen extent -3.2,-3.2 3.2,3.2, body extent -5,-3 5,3, height 5.13
LCD-16x2 [mm]
  rect 1.9x1.9 hole 1: 1(44,2.5)
  round 1.9 hole 1: 2(41.46,2.5) 3(38.92,2.5) 4(36.38,2.5) 5(33.84,2.5) 6(31.3,2.5) 7(28.76,2.5) 8(26.22,2.5) 9(23.68,2.5) 10(21.14,2.5) 11(18.6,2.5) 12(16.06,2.5) 13(13.52,2.5) 14(10.98,2.5) 15(46.54,2.5) 16(49.08,2.5)
  body extent 0,0 122,44, height 10.1
LQFN-20 [mm] "QFN, 20-Leads, Body 3,00x4,00mm, Pitch 0,50mm, Thermal Pad 1,40x2,40mm, IPC Medium Density"
  rect 0.9x0.25 smd: 1(-1.375,1.25) 2(-1.375,0.75) 3(-1.375,0.25) 4(-1.375,-0.25) 5(-1.375,-0.75) 6(-1.375,-1.25) 11(1.375,-1.25) 12(1.375,-0.75) 13(1.375,-0.25) 14(1.375,0.25) 15(1.375,0.75) 16(1.375,1.25)
  rect 0.25x0.9 smd: 7(-0.75,-1.875) 8(-0.25,-1.875) 9(0.25,-1.875) 10(0.75,-1.875) 17(0.75,1.875) 18(0.25,1.875) 19(-0.25,1.875) 20(-0.75,1.875)
  rect 1.4x2.4 smd: 21(0,0)
  silkscreen extent -2.42,-2.15 1.65,2.15, body extent -1.5,-2 1.5,2, height 1.03
LQFP-100 [mm] "TSQFP, 100-Leads, Body 14,00x14,00mm, Pitch 0,50mm, IPC Medium Density"
  rect 1.45x0.3 smd: 1(-7.725,6) 2(-7.725,5.5) 3(-7.725,5) 4(-7.725,4.5) 5(-7.725,4) 6(-7.725,3.5) 7(-7.725,3) 8(-7.725,2.5) 9(-7.725,2) 10(-7.725,1.5) 11(-7.725,1) 12(-7.725,0.5) 13(-7.725,0) 14(-7.725,-0.5) 15(-7.725,-1) 16(-7.725,-1.5) 17(-7.725,-2) 18(-7.725,-2.5) 19(-7.725,-3) 20(-7.725,-3.5) 21(-7.725,-4) 22(-7.725,-4.5) 23(-7.725,-5) 24(-7.725,-5.5) 25(-7.725,-6) 51(7.725,-6) 52(7.725,-5.5) 53(7.725,-5) 54(7.725,-4.5) 55(7.725,-4) 56(7.725,-3.5) 57(7.725,-3) 58(7.725,-2.5) 59(7.725,-2) 60(7.725,-1.5) 61(7.725,-1) 62(7.725,-0.5) 63(7.725,0) 64(7.725,0.5) 65(7.725,1) 66(7.725,1.5) 67(7.725,2) 68(7.725,2.5) 69(7.725,3) 70(7.725,3.5) 71(7.725,4) 72(7.725,4.5) 73(7.725,5) 74(7.725,5.5) 75(7.725,6)
  rect 0.3x1.45 smd: 26(-6,-7.725) 27(-5.5,-7.725) 28(-5,-7.725) 29(-4.5,-7.725) 30(-4,-7.725) 31(-3.5,-7.725) 32(-3,-7.725) 33(-2.5,-7.725) 34(-2,-7.725) 35(-1.5,-7.725) 36(-1,-7.725) 37(-0.5,-7.725) 38(0,-7.725) 39(0.5,-7.725) 40(1,-7.725) 41(1.5,-7.725) 42(2,-7.725) 43(2.5,-7.725) 44(3,-7.725) 45(3.5,-7.725) 46(4,-7.725) 47(4.5,-7.725) 48(5,-7.725) 49(5.5,-7.725) 50(6,-7.725) 76(6,7.725) 77(5.5,7.725) 78(5,7.725) 79(4.5,7.725) 80(4,7.725) 81(3.5,7.725) 82(3,7.725) 83(2.5,7.725) 84(2,7.725) 85(1.5,7.725) 86(1,7.725) 87(0.5,7.725) 88(0,7.725) 89(-0.5,7.725) 90(-1,7.725) 91(-1.5,7.725) 92(-2,7.725) 93(-2.5,7.725) 94(-3,7.725) 95(-3.5,7.725) 96(-4,7.725) 97(-4.5,7.725) 98(-5,7.725) 99(-5.5,7.725) 100(-6,7.725)
  silkscreen extent -7.85,-6.6 6.6,6.83, body extent -7,-7 7,7, height 1.6
R0603 [mm] "Chip Resistor, 2-Leads, Body 1,60x0,80mm, IPC Medium Density"
  rect 0.85x0.9 smd: 1(-0.775,0) 2(0.775,0)
  silkscreen extent -1.45,-0.7 1.45,0.7, body extent -0.8,-0.4 0.8,0.4, height 0.45
SOIC-16 [mm] "SOIC, 16-Leads, Body 10,30x7,50mm, Pitch 1,27mm, IPC Medium Density"
  rect 2x0.6 smd: 1(-4.65,4.445)
  rrect50% 2x0.6 smd: 2(-4.65,3.175) 3(-4.65,1.905) 4(-4.65,0.635) 5(-4.65,-0.635) 6(-4.65,-1.905) 7(-4.65,-3.175) 8(-4.65,-4.445) 9(4.65,-4.445) 10(4.65,-3.175) 11(4.65,-1.905) 12(4.65,-0.635) 13(4.65,0.635) 14(4.65,1.905) 15(4.65,3.175) 16(4.65,4.445)
  silkscreen extent -5.75,-5.25 3.4,5.32, body extent -5.24,-5.17 5.24,5.18, height 2.65
TRIMMER-RESISTOR [mm]
  rect 0.8x0.65 smd: 1(-1.3,0.625) 3(-1.3,-0.625)
  rect 0.8x1 smd: 2(1.3,0)
  silkscreen extent -2.3,-1.2 1.42,1.27, body extent -1.41,-1.2 1.42,1.2, height 1.72
XFL-2-430X430X210 [mm] "Molded Inductor, 2-Leads, Body 4,00x4,00mm, IPC Medium Density"
  rect 1.8x3.3 smd: 1(-1.725,0) 2(1.725,0)
  silkscreen extent -2.15,-2.15 2.15,2.15, body extent -2.15,-2.15 2.15,2.15, height 2.1

## Part data
BQ1: library part q0002, "=Описание", ID=q0002, Корпус="3,2 x 1,3 x 0,7", Наименование=CSTNE8M00G520000R0, Описание="Кварцевый резонатор 8 МГц", Производитель="Murata Manufacturing Co., Ltd.", Фамилия=Игнатова, Частота="8 МГц"
C1: library part c0047, "=Описание", ID=c0047, Корпус=1210, Наименование=CL32A476KOJNNNE, Напряжение="16 В", Номинал="47 мк", Номинальное напряжение="16 В", Описание="Конденсатор чип 1210 47 мкФ 16 В ±10 %", Отклонение="±10 %", Производитель="Samsung electro-mechanics", Рабочие температуры="от -55 °С до +85 °С", Фамилия=Игнатова
C2 C8: library part c0029, "=Описание", HelpURL=https://www.yageo.com/upload/media/product/productsearch/datasheet/mlcc/UPY-GPHC_X5R_4V-to-50V_26.pdf, ID=c0029, Корпус=0603, Наименование=CC0603KRX5R8BB475, Напряжение="25 В", Номинал="4,7 мк", Номинальное напряжение="25 В", Описание="Конденсатор чип 0603 4,7 мкФ 25 В ±10 %", Отклонение="±10 %", Производитель="YAGEO Corp.", Рабочие температуры="от -55 °С до +85 °С", Фамилия=Ларионов
C3 C6 C19 C24: library part c0045, "=Описание", ID=c0045, Корпус=0201, Наименование=CL03C4R7CA3GNNC, Напряжение="25 В", Номинал="4,7 п", Номинальное напряжение="25 В", Описание="Конденсатор чип 0201 4,7 пФ 25 В ±25 %", Отклонение="±25 %", Производитель="Samsung electro-mechanics", Рабочие температуры="от -55 °С до +125 °С", Фамилия=Игнатова
C4 C23: library part c0044, "=Описание", ID=c0044, Корпус=0201, Наименование=CL03B471KA3NNNC, Напряжение="25 В", Номинал="470 п", Номинальное напряжение="25 В", Описание="Конденсатор чип 0201 470 пФ 25 В ±10 %", Отклонение="±10 %", Производитель="Samsung electro-mechanics", Рабочие температуры="от -55 °С до +125 °С", Фамилия=Игнатова
C5 C7 C10 C11 C13 C15 C17 C28: library part c0018, "=Описание", HelpURL=https://www.yageo.com/upload/media/product/products/datasheet/mlcc/UPY-GPHC_X7R_6.3V-to-50V_20.pdf, ID=c0018, Корпус=0603, Наименование=CC0603JRX7R9BB104, Напряжение="50 В", Номинал="0,1 мк", Номинальное напряжение="50 В", Описание="Конденсатор чип 0603 0,1 мкФ 50 В ±5 %", Отклонение="±5 %", Производитель="YAGEO Corp.", Рабочие температуры="от -55 °С до +125 °С", Фамилия=Ларионов
C9 C18: library part c0046, "=Описание", ID=c0046, Корпус=0201, Наименование=CC0201KRX7R8BB103, Напряжение="25 В", Номинал="10 н", Номинальное напряжение="25 В", Описание="Конденсатор чип 0201 10 нФ 25 В ±10 %", Отклонение="±10 %", Производитель="YAGEO Corp.", Рабочие температуры="от -55 °С до +85 °С", Фамилия=Игнатова
C12 C14 C16: library part c0022, "=Описание", HelpURL=https://www.yageo.com/upload/media/product/products/datasheet/mlcc/UPY-GPHC_X7R_6.3V-to-50V_20.pdf, ID=c0022, Корпус=0603, Наименование=CC0603KRX7R8BB105, Напряжение="25 В", Номинал="1 мк", Номинальное напряжение="25 В", Описание="Конденсатор чип 0603 1 мкФ 25 В ±10 %", Отклонение="±10 %", Производитель="YAGEO Corp.", Рабочие температуры="от -55 °С до +125 °С", Фамилия=Ларионов
C20 C22 C26 C29 C30: library part c0039, "=Описание", HelpURL=https://www.vishay.com/capacitors/list/product-40002/, ID=c0039, Корпус=1206, Наименование=293D104X9050A2TE3, Напряжение="50 В", Номинал="0,1 мк", Номинальное напряжение="50 В", Описание="Конденсатор чип 1206 0,1 мкФ 50 В ±10 % полярный", Отклонение="±10 %", Производитель="Vishay Intertechnology, Inc.", Рабочие температуры="от -55 °С до +125 °С", Фамилия=Ларионов
C21 C25: library part c0025, "=Описание", HelpURL=https://www.yageo.com/upload/media/product/productsearch/datasheet/mlcc/UPY-GPHC_X7R_6.3V-to-50V_20.pdf, ID=c0025, Корпус=0603, Наименование=CC0603KRX7R6BB225, Напряжение="10 В", Номинал="2,2 мк", Номинальное напряжение="10 В", Описание="Конденсатор чип 0603 2,2 мкФ 10 В ±10 %", Отклонение="±10 %", Производитель="YAGEO Corp.", Рабочие температуры="от -55 °С до +125 °С", Фамилия=Чернов
C27: library part c0048, "=Описание", ID=c0048, Корпус=1210, Наименование=CC1210MKX5R7BB107, Напряжение="16 В", Номинал="100 мк", Номинальное напряжение="16 В", Описание="Конденсатор чип 1210 100 мкФ 16 В ±20 %", Отклонение="±20 %", Производитель="YAGEO Corp.", Рабочие температуры="от -55 °С до +85 °С", Фамилия=Игнатова
DD1: library part dd0009, "=Описание", ID=dd0009, Входное напряжение="от 3 В до 42 В", Выходное напряжение="от 1,8 В до 5 В", Коммутируемый ток="до 2 А", Корпус=LQFN-20, Наименование=LT8653S, Описание="Двухканальный понижающий преобразователь напряжения 42 В и 2А", Производитель="Analog Devices", Рабочие температуры="от -40 °С до +125 °С", Фамилия=Игнатова, Частота переключения="от 300 кГц до 3 МГц"
DD2 DD3 HG1 HG2: "=Описание"
L1: library part l0003, "=Описание", ID=l0003, Корпус=0603, Наименование=FCM1608KF-601T05, Описание="Ферритовая бусина 600 Ом ±25 %", Отклонение, 100 Мгц="±25 %", Производитель=Tai-tech, Рабочие температуры="от -55 °С до +125 °С", Сопротивление, 100 МГц="600 Ом", Сопротивление при постоянном токе="0,5 Ом", Фамилия=Игнатова
L2 L3: library part l0007, "=Описание", ID=l0007, Индуктивность="2,2 мкГн", Корпус="4,3 x 4,3 x 2,1", Максимальное активное сопротивление="23,5 мОм", Наименование=XFL4020-222MEB, Номинал="2,2 мкГн", Номинальное активное сопротивление="21,35 мОм", Номинальный ток (при нагреве на 20 °С/40 °С)="8 А", Описание="Индуктивность 2,2 мкГн ±20 %", Отклонение="±20 %", Производитель="Coilcraft Inc.", Рабочее напряжение="от 0 В до 20 В", Рабочие температуры="от -40 °С до +125 °С", Резонансная частота="38 МГц", Ток насыщения="3,5 А", Фамилия=Игнатова
R1 R8: library part r0081, "=Описание", HelpURL=https://www.yageo.com/upload/media/product/productsearch/datasheet/rchip/PYu-RC_Group_51_RoHS_L_11.pdf, ID=r0081, Корпус=0603, Наименование=RC0603FR-071ML, Номинал="1 М", Номинальное напряжение="75 В", Номинальный ток="1 А", Описание="Резистор чип 0603 1 МОм ±1 % 0,1 Вт", Отклонение="±1 %", Производитель="YAGEO Corp.", Рабочие температуры="от -55 °С до +155 °С", Фамилия=Ляпцев
R2: library part r0084, "=Описание", ID=r0084, Корпус=0603, Наименование=RC0603FR-13191KL, Номинал="191 к", Номинальное напряжение="75 В", Номинальный ток="1 А", Описание="Резистор чип 0603 191 кОм ±1 % 0,1 Вт", Отклонение="±1 %", Производитель="YAGEO Corp.", Рабочие температуры="от -55 °С до +155 °С", Фамилия=Игнатова
R3: library part r0086, "=Описание", ID=r0086, Корпус=0603, Наименование=RC0603FR-1322K1L, Номинал="22,1 к", Номинальное напряжение="75 В", Номинальный ток="1 А", Описание="Резистор чип 0603 22,1 кОм ±1 % 0,1 Вт", Отклонение="±1 %", Производитель="YAGEO Corp.", Рабочие температуры="от -55 °С до +155 °С", Фамилия=Игнатова
R4: library part r0046, "=Описание", HelpURL=https://www.yageo.com/upload/media/product/productsearch/datasheet/rchip/PYu-RC_Group_51_RoHS_L_11.pdf, ID=r0046, Корпус=0603, Наименование=RC0603FR-0715KL, Номинал="15 к", Номинальное напряжение="75 В", Номинальный ток="1 А", Описание="Резистор чип 0603 15 кОм ±1 % 0,1 Вт", Отклонение="±1 %", Производитель="YAGEO Corp.", Рабочие температуры="от -55 °С до +155 °С", Фамилия=Паньков
R5 R6: library part r0073, "=Описание", HelpURL=https://www.yageo.com/upload/media/product/productsearch/datasheet/rchip/PYu-RC_Group_51_RoHS_L_11.pdf, ID=r0073, Корпус=0603, Наименование=RC0603FR-07100KL, Номинал="100 к", Номинальное напряжение="75 В", Номинальный ток="1 А", Описание="Резистор чип 0603 100 кОм ±1 % 0,1 Вт", Отклонение="±1 %", Производитель="YAGEO Corp.", Рабочие температуры="от -55 °С до +155 °С", Фамилия=Водорезов
R7: library part r0087, "=Описание", ID=r0087, Корпус=0603, Наименование=RC0603FR-1334K8L, Номинал="34,8 к", Номинальное напряжение="75 В", Номинальный ток="1 А", Описание="Резистор чип 0603 34,8 кОм ±1 % 0,1 Вт", Отклонение="±1 %", Производитель="YAGEO Corp.", Рабочие температуры="от -55 °С до +155 °С", Фамилия=Игнатова
R9: library part r0085, "=Описание", ID=r0085, Корпус=0603, Наименование=RC0603FR-13316KL, Номинал="316 к", Номинальное напряжение="75 В", Номинальный ток="1 А", Описание="Резистор чип 0603 316 кОм ±1 % 0,1 Вт", Отклонение="±1 %", Производитель="YAGEO Corp.", Рабочие температуры="от -55 °С до +155 °С", Фамилия=Игнатова
R10: library part r0040, "=Описание", HelpURL=https://www.yageo.com/upload/media/product/productsearch/datasheet/rchip/PYu-RC_Group_51_RoHS_L_11.pdf, ID=r0040, Корпус=0603, Наименование=RC0603FR-0710KL, Номинал="10 к", Номинальное напряжение="75 В", Номинальный ток="1 А", Описание="Резистор чип 0603 10 кОм ±1 % 0,1 Вт", Отклонение="±1 %", Производитель="YAGEO Corp.", Рабочие температуры="от -55 °С до +155 °С", Фамилия=Самарин
R11 R13: library part TRIMMER-RESISTOR, "=Описание"
R12 R14: library part r0010, "=Описание", HelpURL=https://www.yageo.com/upload/media/product/productsearch/datasheet/rchip/PYu-RC_Group_51_RoHS_L_11.pdf, ID=r0010, Корпус=0603, Наименование=RC0603FR-07330RL, Номинал=330, Номинальное напряжение="75 В", Номинальный ток="1 А", Описание="Резистор чип 0603 330 Ом ±1 % 0,1 Вт", Отклонение="±1 %", Производитель="YAGEO Corp.", Рабочие температуры="от -55 °С до +155 °С", Фамилия=Ларионов
S1: library part sw0002, "=Описание", HelpURL=https://www.te.com/usa-en/product-4-1437565-1.html, ID=sw0002, Количество контактов=1, Корпус=6,00x6,00x4,98, Наименование=FSM4JSMA, Описание="Тактовая кнопка поверхностного монтажа", Производитель="TE Connectivity", Промывка=Разрешена, Рабочие температуры="от -35 °С до +85 °С", Сопротивление контакта="100 мОм", Ток нагрузки="50 мА @ 24 В", Фамилия=Паньков
X1: library part x0006, "=Описание", Contact_1=+12V, Contact_2=GND, HelpURL=http://www.connfly.com/productshow.aspx?id=352, ID=x0006, Наименование=DS1029-2-MRW6XB, Описание="CWF 2 pin Type B 2,5 мм вилка угловой", Производитель="Connfly Electronic Co. LTD.", Фамилия=Ларионов
X2: library part x0009, "=Описание", Contact_1=GND, Contact_2=TX, Contact_3=RX, Contact_4=GND, HelpURL=http://en.connfly.group/product/xVkr=EusQssAN0gN=Aos=mU+UrVkR9kqEAN0gN0MUR+g+NB+A, ID=x0009, Наименование=DS1069-4MRW6XA, Описание="CWF 4 pin Type A 2,5 мм вилка угловой", Производитель="Connfly Electronic Co., Ltd.", Фамилия=Паньков

## Free pads (board coordinates)
  round 6 hole 3.5: 1(88.7,177.355) 2(125.7,177.355) 3(125.7,292.355) 4(88.7,292.355) 5(135.3,177.275) 5(172.3,177.275) 7(172.3,292.275) 8(135.3,292.275)

## Via types
v1: diameter 0.6, hole 0.3, Top Layer to Bottom Layer, tented both sides, 699 vias

## Nets (pads, with @x,y where several pads share a name; then routed paths per layer and width w, separated by ;. In a path a pad name is that pad's centre, name@x,y a point inside that pad or via, vN(x,y) a via of type N, cw(c..) or ccw(c..) an arc to the next point about the centre after c; other vN are vias at no path point)
+3.3V: C2.2 C5.2 C7.2 C10.2 C11.2 C13.2 C15.2 C16.1 C20.1 C24.1 C27.1 DD1.10 DD2.6 DD2.11 DD2.19 DD2.28 DD2.50 DD2.75 DD2.100 DD3.16 L1.1 L3.2 R6.2 R8.2 | length 40.4
  Bottom Layer w0.2: v1(86.175,192.475) 86.177,192.473 87.873,192.473 DD3.16 ; C2.2@87.9,201.575 88.075,201.75 v1(88.075,202.85) ; C15.2@91.575,206.45 91.6,206.425 DD2.28 v1(95.35,206.425) ; C11.2 92.775,219.275 92.775,218.5 93.625,217.65 DD2.50 ; L1.1 92.925,203.75 v1(94.35,203.75) ; DD1.10 93.55,233.575 93.8,233.325 v1(93.8,232.75) ; DD2.50@93.513,217.437 95.463,217.437 v1(95.475,217.45) ; v1(98.35,205.65) DD2.19 98.35,201.6 C7.2 ; C13.2 DD2.11 v1(102.35,205.475) ; C20.1 104,192.625 v1(104,194.35) ; v1(104.85,205.45) DD2.6 104.9,203.65 104.9,202.725 105.35,202.275 C16.1@110.25,202.275 ; v1(107.35,217.525) DD2.75 107.358,219.142 107.567,219.142 108.375,219.95 C5.2 ; v1(107.45,205.425) DD2.100 111.625,205.425 C10.2
  other v1: 90.95,227.25 94.6,227.275 95.725,227.275 96.93,227.311 98.225,227.3 99.375,227.3 102.875,227.3 104.025,227.3 100.65,227.325 101.825,227.325 91.675,228.025 94.575,228.35 95.7,228.35 93.1,229.1 92.25,229.775
+5V: C1.1 C3.1 HG1.2 HG2.2 L2.1 R1.2 R5.1 R11.1 R12.1 R13.1 R14.1 | length 5.4
  Top Layer w0.2: v1(77.55,267.3) R11.1 ; v1(80.875,258.375) R13.1
  Bottom Layer w0.2: R14.1@90.975,251.125 v1(90.975,252.7) ; R12.1 v1(137.975,252.225)
  other v1: 94.725,239.725 95.825,239.725 104.325,240.75 102.025,240.775 103.15,240.775 101.975,241.95 103.1,241.95 95.925,242.575 100.825,243.075 101.95,243.075 98.575,243.125 99.7,243.125 95.175,243.325
GND: BQ1.2 C1.2 C2.1 C4.2 C5.1 C6.2 C7.1 C8.2 C9.2 C10.1 C11.1 C12.2 C13.1 C14.1 C15.1 C16.2 C17.2 C18.2 C19.2 C20.2 C21.2 C22.2 C23.2 C25.2 C26.1 C27.2 C28.1 DD1.1 DD1.2 DD1.21 DD2.10 DD2.20 DD2.27 DD2.74 DD2.99 DD3.15 HG1.1 HG1.5 HG1.16 HG2.1 HG2.5 HG2.16 R2.1 R4.1 R9.1 R10.1 R11.3 R13.3 S1.1 X1.2 X2.1 X2.4
  other v1: 78.15,176.35 81.475,176.35 95.6,176.375 102.5,176.375 113.875,176.375 99.075,176.4 105.975,176.4 109.3,176.4 117.825,176.45 74.925,176.5 164.4,177.225 161.25,177.25 158.025,177.4 154.35,177.575 151.2,177.6 143.925,177.725 147.975,177.75 78.25,179.225 81.575,179.225 75.025,179.375 95.45,179.85 102.35,179.85 98.925,179.875 105.825,179.875 109.15,179.875 113.825,180 164.475,180.15 117.925,180.225 158.1,180.325 161.375,180.325 154.425,180.5 148.05,180.675 151.325,180.675 143.95,180.975 117.925,183.9 164.675,184 161.525,184.025 113.625,184.1 144.2,184.15 158.3,184.175 154.625,184.35 151.475,184.375 148.25,184.525 125.275,186.75 128.55,186.75 164.75,186.925 121.175,187.05 158.375,187.1 161.65,187.1 138.15,187.2 141.5,187.25 154.7,187.275 113.875,187.35 168.875,187.35 172.15,187.35 117.925,187.375 131.55,187.375 134.875,187.375 148.325,187.45 151.6,187.45 144.825,187.475 161.45,189.75 164.775,189.75 158.175,189.925 151.4,190.1 154.725,190.1 121.425,190.225 148.125,190.275 118,190.3 172.15,190.3 138.225,190.375 141.45,190.375 128.7,190.45 168.925,190.45 131.675,190.525 135,190.525 113.9,190.6 125.475,190.6 144.95,190.625 161.525,192.925 164.85,192.925 158.3,193.075 151.475,193.275 154.8,193.275 141.5,193.35 128.2,193.375 169,193.375 172.275,193.375 125.05,193.4 148.25,193.425 131.75,193.45 135.075,193.45 138.35,193.45 121.825,193.55 145.025,193.55 114.175,193.7 118.225,193.725 138.325,196.025 154.95,196.025 158.3,196.075 172.25,196.175 131.725,196.2 135.05,196.2 148.35,196.2 151.675,196.2 128.275,196.3 141.5,196.3 145,196.3 161.625,196.3 165.65,196.35 168.975,196.35 121.9,196.475 125.175,196.475 118.3,196.65 114.2,196.95 78.125,197.525 81.55,197.6 124.975,199.125 128.3,199.125 141.55,199.175 138.4,199.2 155.025,199.2 158.25,199.2 121.7,199.3 131.85,199.35 135.175,199.35 148.475,199.35 151.8,199.35 172.325,199.35 145.125,199.45 161.75,199.45 165.775,199.5 169.1,199.5 74.475,200.875 81.525,200.875 78.05,200.9 141.625,202.1 158.3,202.175 135.25,202.275 138.525,202.275 148.55,202.275 151.875,202.275 155.15,202.275 125.05,202.3 128.375,202.3 131.8,202.375 161.825,202.375 165.85,202.425 169.175,202.425 172.45,202.425 121.825,202.45 145.075,202.475 77.975,203.875 74.5,204.125 81.55,204.125 155.125,204.85 138.325,204.925 141.65,204.925 172.425,205 148.525,205.025 151.85,205.025 131.725,205.1 135.05,205.1 158.3,205.125 161.8,205.125 165.825,205.175 169.15,205.175 145,205.2 128.375,205.475 125.225,205.5 122,205.65 158.35,208 155.2,208.025 138.4,208.1 141.725,208.1 148.65,208.175 151.975,208.175 172.5,208.175 131.85,208.25 135.175,208.25 161.925,208.275 165.95,208.325 169.275,208.325 145.125,208.35 128.45,208.4 122.075,208.575 125.35,208.575 158.425,210.925 152.05,211.1 155.325,211.1 148.6,211.2 169.35,211.25 172.625,211.25 145.2,211.275 161.875,211.3 165.9,211.35 155.125,213.75 158.45,213.75 172.425,213.9 148.525,213.925 151.85,213.925 161.8,214.025 165.825,214.075 169.15,214.075 155.2,216.925 158.525,216.925 151.975,217.075 172.5,217.075 161.925,217.175 165.95,217.225 169.275,217.225 128.2,217.75 125.05,217.775 121.825,217.925 132,218.325 135.325,218.325 155.325,220 158.525,220.075 162,220.1 166.025,220.15 169.35,220.15 172.625,220.15 128.275,220.675 121.9,220.85 125.175,220.85 132.075,221.25 135.4,221.25 138.675,221.25 172.925,223.325 124.975,223.5 128.3,223.5 169.1,223.5 121.7,223.675 162.5,223.675 165.825,223.675 158.875,223.775 138.65,223.825 132.05,224 135.375,224 141.825,224.1 75.275,224.6 78.7,224.675 172.85,226.525 158.925,226.65 125.05,226.675 128.375,226.675 169.175,226.675 121.825,226.825 162.625,226.825 165.95,226.825 141.875,226.975 138.725,227 132.175,227.15 135.5,227.15 145.45,227.25 78.775,227.6 75.3,227.85 107.275,229.275 172.85,229.5 159,229.575 166.025,229.75 169.3,229.75 128.375,229.85 149.175,229.85 162.575,229.85 125.225,229.875 141.95,229.9 122,230.025 135.575,230.075 138.85,230.075 132.125,230.175 145.4,230.275 110.8,231.95 107.55,232.125 172.925,232.125 159.025,232.4 169.1,232.4 149.1,232.575 162.5,232.575 165.825,232.575 138.65,232.725 141.975,232.725 128.45,232.775 132.05,232.9 135.375,232.9 122.075,232.95 125.35,232.95 145.325,233 90.3,233.975 91.15,233.975 92,233.975 90.3,234.65 92,234.65 91.15,234.675 110.775,234.7 107.475,234.85 173,235.175 159.1,235.575 169.175,235.575 125.15,235.6 128.475,235.6 149.225,235.725 162.625,235.725 165.95,235.725 121.875,235.775 138.725,235.9 142.05,235.9 132.175,236.05 135.5,236.05 145.45,236.15 110.925,237.325 107.675,237.5 149.3,238.65 162.7,238.65 166.025,238.65 169.3,238.65 173,238.65 159.1,238.725 125.225,238.775 128.55,238.775 122,238.925 132.25,238.975 135.575,238.975 138.85,238.975 142.05,239.05 145.525,239.075 110.9,240.075 107.6,240.225 128.7,242.125 135.375,242.125 138.7,242.125 125.55,242.15 173.275,242.2 122.325,242.3 132.1,242.3 169.3,242.45 166.15,242.475 162.925,242.625 159.275,242.65 142.3,242.75 149.1,242.75 145.5,242.825 110.925,243.1 107.675,243.275 128.775,245.05 173.35,245.125 122.4,245.225 125.675,245.225 145.85,245.325 149.2,245.375 169.375,245.375 142.575,245.5 163,245.55 166.275,245.55 159.35,245.575 78.65,245.625 81.725,245.625 75.525,245.7 110.9,245.85 107.6,246 125.475,247.875 128.8,247.875 173.375,247.95 122.2,248.05 166.075,248.2 169.4,248.2 162.8,248.375 159.375,248.4 145.925,248.5 149.15,248.5 99.025,248.65 102.1,248.65 142.7,248.65 95.9,248.725 78.775,248.775 81.85,248.775 107.9,248.8 75.65,248.85 104.65,248.975 125.55,251.05 128.875,251.05 173.45,251.125 122.325,251.2 166.15,251.375 169.475,251.375 149.2,251.475 162.925,251.525 107.875,251.55 99.1,251.575 142.775,251.575 146.05,251.575 159.45,251.575 102.05,251.675 78.85,251.7 104.575,251.7 95.85,251.75 81.8,251.8 75.6,251.875 146.025,254.15 173.45,254.275 99.075,254.325 142.75,254.325 125.55,254.35 128.875,254.35 101.975,254.4 149.2,254.425 78.825,254.45 163,254.45 166.275,254.45 95.775,254.475 81.725,254.525 122.275,254.525 169.475,254.525 75.525,254.6 119.35,254.725 159.45,254.725 146.1,257.325 159.55,257.425 139.55,257.475 142.875,257.475 169.575,257.5 125.625,257.525 128.95,257.525 166.425,257.525 173.5,257.55 122.4,257.675 163.2,257.675 119.375,257.8 75.525,258.15 159.625,260.35 169.65,260.425 173.5,260.5 163.275,260.6 166.55,260.6 119.45,260.975 122.475,261.025 149.35,263.05 159.65,263.175 173.475,263.225 166.35,263.25 169.675,263.25 163.075,263.425 146.1,266.225 149.425,266.225 159.725,266.35 139.55,266.375 142.875,266.375 173.55,266.4 166.425,266.425 169.75,266.425 163.2,266.575 126.425,268.5 129.75,268.5 100.075,268.6 103.4,268.6 119.875,268.65 123.2,268.65 116.675,268.7 93.525,268.75 96.85,268.75 82.575,269.275 139.625,269.3 142.95,269.3 146.225,269.3 149.425,269.375 173.675,269.475 159.725,269.5 163.275,269.5 166.55,269.5 169.75,269.575 129.725,272.35 100.175,272.425 113.45,272.525 126.675,272.525 173.65,272.525 123.525,272.55 170.5,272.55 116.8,272.575 93.575,272.6 96.9,272.6 160.1,272.625 139.6,272.675 163.45,272.675 120.3,272.7 167.275,272.7 79.275,272.775 143.425,272.8 146.375,272.8 149.2,272.8 82.625,272.825 76,272.95 126.75,275.45 173.725,275.45 120.375,275.625 123.65,275.625 167.35,275.625 170.625,275.625 113.525,275.7 116.75,275.7 93.7,275.75 97.025,275.75 146.775,275.8 160.175,275.8 163.4,275.8 110.3,275.85 129.875,275.85 139.65,275.925 79.35,275.95 82.575,275.95 143.55,275.95 156.95,275.95 76.125,276.1 123.45,278.275 126.775,278.275 170.425,278.275 173.75,278.275 120.175,278.45 167.15,278.45 116.8,278.675 129.9,278.675 107.05,278.775 110.375,278.775 113.65,278.775 163.45,278.775 153.7,278.875 157.025,278.875 160.3,278.875 82.625,278.925 76.2,279.025 79.475,279.025 113.625,281.35 123.525,281.45 126.85,281.45 160.275,281.45 170.5,281.45 173.825,281.45 103.525,281.525 107.025,281.525 110.35,281.525 79.45,281.6 120.3,281.6 167.275,281.6 116.8,281.625 153.675,281.625 157,281.625 150.05,281.725 163.45,281.725 76.175,281.775 129.975,281.85 82.625,281.875 103.575,284.4 100.425,284.425 116.85,284.5 113.7,284.525 120.375,284.525 123.65,284.525 167.35,284.525 170.625,284.525 126.85,284.6 150.1,284.6 163.5,284.6 173.825,284.6 146.95,284.625 160.35,284.625 107.15,284.675 110.475,284.675 82.675,284.75 79.525,284.775 153.8,284.775 157.125,284.775 76.3,284.925 129.975,285 103.65,287.325 116.925,287.425 97.275,287.5 100.55,287.5 150.175,287.525 163.575,287.525 93.825,287.6 110.55,287.6 113.825,287.6 82.75,287.675 107.1,287.7 143.8,287.7 147.075,287.7 157.2,287.7 160.475,287.7 140.35,287.8 153.75,287.8 76.375,287.85 79.65,287.85 100.35,290.15 103.675,290.15 113.625,290.25 116.95,290.25 93.75,290.325 97.075,290.325 146.875,290.35 150.2,290.35 160.275,290.35 163.6,290.35 107.025,290.425 110.35,290.425 79.45,290.5 82.775,290.5 140.275,290.525 143.6,290.525 153.675,290.525 157,290.525 76.175,290.675 100.425,293.325 103.75,293.325 113.7,293.425 117.025,293.425 93.875,293.475 97.2,293.475 146.95,293.525 150.275,293.525 160.35,293.525 163.675,293.525 107.15,293.575 110.475,293.575 79.525,293.675 82.85,293.675 140.4,293.675 143.725,293.675 153.8,293.675 157.125,293.675 76.3,293.825
NetBQ1_1: BQ1.1 DD2.13 | length 17.2
  Top Layer w0.2: v1(91.713,210.437) 99.563,210.437 101.35,208.65 v1(101.35,206.95)
  Bottom Layer w0.2: BQ1.1 89.881,210.431 91.706,210.431 v1(91.713,210.437) ; DD2.13@101.3,203.65 DD2.13 v1(101.35,206.95)
NetBQ1_3: BQ1.3 DD2.12 | length 20.1
  Top Layer w0.2: v1(91.75,212.825) 99.3,212.825 102.4,209.725 v1(102.4,207)
  Bottom Layer w0.2: BQ1.3 v1(91.75,212.825) ; DD2.12 101.85,204.949 101.75,205.049 101.75,205.825 102.4,206.475 v1(102.4,207)
NetC3_2: C3.2 DD1.12 R1.1 R2.2 | length 17.9
  Top Layer w0.2: v1(93.525,239.5) 94.7,238.325 94.7,231.975 v1(93.725,231)
  Bottom Layer w0.2: DD1.12 91.9,231.8 92.7,231 v1(93.725,231) ; v1@93.5,239.5 93.5,241.075 93.6,241.175 R1.1 93.54,241.235 C3.2 R2.2@93.54,244.675
NetC4_1: C4.1 R3.1 | length 1.6
  Bottom Layer w0.2: C4.1 91.365,242.715 R3.1
NetC6_1: C6.1 DD1.11 R3.2 | length 13.3
  Top Layer w0.2: v1@91.237,239.663 91.537,239.663 93.175,238.025 v1(93.175,231.875)
  Bottom Layer w0.2: C6.1@89.85,241.175 R3.2 v1(91.375,239.8) ; DD1.11 92.4,232.292 92.817,231.875 v1(93.175,231.875)
NetC8_1: C8.1 DD1.18 DD1.19 DD1.20 X1.1
NetC9_1: C9.1 DD1.13 | length 22.7
  Top Layer w0.2: v1@86.525,223.05 94.2,223.05 96.33,225.18 96.33,229.045 95.175,230.2 92.674,230.2 91.974,230.9 v1(91.9,230.9)
  Bottom Layer w0.2: C9.1 85.855,223.09 86.545,223.09 v1(86.55,223.085) ; DD1.13 91.4,231.4 v1(91.9,230.9)
NetC12_1: C12.1 DD1.9 | length 3.1
  Bottom Layer w0.2: DD1.9 94.75,234.075 95.1,233.725 C12.1
NetC14_2: C14.2 C17.1 DD2.21 DD2.22 L1.2 | length 12.3
  Bottom Layer w0.2: L1.2 91.42,201.62 C14.2 93.925,201.6 C17.1 93.975,201.55 95.925,201.55 96.85,202.475 DD2.22 96.85,204.933 96.967,205.05 97.233,205.05 97.35,204.933 DD2.21
NetC18_1: C18.1 DD1.14 | length 21.4
  Top Layer w0.2: v1@86.682,224.025 93.475,224.025 93.9,224.45 93.9,225.025 93.525,225.4 90.45,225.4 88.875,226.975 88.875,229 v1(90.9,231.025)
  Bottom Layer w0.2: C18.1 85.87,223.995 86.595,223.995 v1(86.6,224) ; v1(90.9,231.025) DD1.14
NetC19_1: C19.1 DD1.16 R7.1 | length 19.1
  Top Layer w0.2: v1@86.512,239.713 88.05,238.175 91.799,238.175 92.15,237.824 92.15,237.326 90.774,235.95 89.975,235.95 89.475,235.45 v1(89.475,231.45)
  Bottom Layer w0.2: C19.1 86.56,241.11 R7.1 ; R7.1@86.5,241.1 86.55,241.05 v1@86.55,239.925 ; v1@86.525,239.95 v1@86.55,239.925 ; v1(86.55,239.75) v1@86.55,239.925 ; v1(89.475,231.45) 89.9,231.875 DD1.16
NetC21_1: C21.1 DD2.73 | length 2.2
  Bottom Layer w0.2: DD2.73 C21.1
NetC22_1: C22.1 DD3.2 | length 10
  Top Layer w0.2: v1(99.125,191.275) 99.875,191.275 103,188.15 103.825,188.15 v1(103.875,188.2)
  Bottom Layer w0.2: DD3.2@97.1,191.275 v1(99.125,191.275) ; v1(103.875,188.2) 103.875,189.95 C22.1
NetC23_1: C23.1 R7.2 | length 1.6
  Bottom Layer w0.2: C23.1 86.56,242.69 R7.2
NetC24_2: C24.2 DD1.15 R8.1 R9.2 | length 7.4
  Bottom Layer w0.2: R9.2@89.301,226.025 C24.2 89.301,229.375 89.301,230.351 90.4,231.45 DD1.15
NetC25_1: C25.1 DD2.49 | length 2.4
  Bottom Layer w0.2: C25.1 DD2.49
NetC26_2: C26.2 DD3.6 | length 6.3
  Bottom Layer w0.2: DD3.6@97.195,186.1 97.1,186.195 98.255,186.195 99.175,185.275 99.175,183.825 100.025,182.975 100.95,182.975 C26.2
NetC28_2: C28.2 DD2.14 S1.2 | length 41.1
  Top Layer w0.2: S1.2@79.29,209.225 S1.2@79.29,209.275 ; S1.2@79.29,218.325 S1.2@79.29,209.275 ; v1(100.45,205.65) 100.45,207.825 99,209.275 S1.2@79.29,209.275
  Bottom Layer w0.2: v1(100.45,205.65) 100.45,205.601 100.85,205.201 DD2.14 100.85,199.725 101.525,199.05 C28.2@102.575,199.05
NetC29_1: C29.1 DD3.1 | length 4
  Bottom Layer w0.2: DD3.1@97.1,192.545 97.12,192.525 C29.1
NetC29_2: C29.2 DD3.3 | length 4.1
  Bottom Layer w0.2: DD3.3@97.1,190.005 101.055,190.005 C29.2
NetC30_1: C30.1 DD3.4 | length 4.4
  Bottom Layer w0.2: DD3.4@97.1,188.735 98.265,188.735 99.125,187.875 C30.1
NetC30_2: C30.2 DD3.5 | length 5.2
  Bottom Layer w0.2: DD3.5@97.1,187.465 97.115,187.45 98.25,187.45 100.275,185.425 C30.2 C30.2@100.95,185.625
NetDD1_3: DD1.3 R6.1 | length 21.8
  Top Layer w0.2: v1(91.55,237.575) 90.675,237.575 88.425,235.325 88.425,226.55 90.25,224.725 v1(93.05,224.725)
  Bottom Layer w0.2: DD1.3 90.9,236.925 v1(91.55,237.575) ; v1(93.05,224.725) R6.1
NetDD1_4: DD1.4 R5.2 | length 4.5
  Bottom Layer w0.2: DD1.4 91.425,235.725 91.425,236.275 91.775,236.625 R5.2@95.2,236.625
NetDD1_7: DD1.7 L2.2 | length 5.9
  Bottom Layer w0.2: DD1.7 95.7,235.075 96.175,235.55 L2.2
NetDD1_8: DD1.8 L3.1 | length 7.5
  Bottom Layer w0.2: DD1.8@93.05,234.55 DD1.8 95.55,234.575 96.125,234 98.075,234 98.575,233.5 L3.1@98.575,232.475 ; L3.1@98.45,232.35 L3.1@98.575,232.475 ; L3.1 L3.1@98.575,232.475 ; L3.1@98.65,232.55 L3.1@98.575,232.475
NetDD1_17: DD1.17 R4.2 | length 2.1
  Bottom Layer w0.2: R4.2 88.1,233.2 88.475,233.575 DD1.17
NetDD2_94: DD2.94 R10.2 | length 2.8
  Bottom Layer w0.2: DD2.94 110.275,208.425 110.9,209.05 R10.2
NetHG1_3: HG1.3 R11.2 | length 61.1
  Top Layer w0.2: R11.2@76.925,265.8 76.945,265.82 125.32,265.82 HG1.3
NetHG1_15: HG1.15 R12.2 | length 4
  Bottom Layer w0.2: HG1.15 137.865,249.24 137.975,249.35 R12.2@138.225,249.35
NetHG2_3: HG2.3 R13.2 | length 7.5
  Top Layer w0.2: R13.2@80.25,257.1 80.4,256.95 HG2.3
NetHG2_15: HG2.15 R14.2 | length 3.3
  Bottom Layer w0.2: HG2.15 90.83,249.33 R14.2
PD0: DD2.81 HG1.4 | length 94.6
  Bottom Layer w0.2: DD2.81 138.375,214.925 152.325,228.875 152.325,254.25 147.175,259.4 HG1.4
PD1: DD2.82 HG1.6 | length 99
  Bottom Layer w0.2: DD2.82 139,214.425 153.125,228.55 153.125,254.775 143.42,264.48 HG1.6
PD2: DD2.83 HG1.11 | length 116.3
  Bottom Layer w0.2: DD2.83 139.65,213.925 153.725,228 153.725,272.15 148.55,277.325 134.425,277.325 HG1.11
PD3: DD2.84 HG1.12 | length 119.2
  Bottom Layer w0.2: DD2.84 140.125,213.425 154.375,227.675 154.375,272.625 147.28,279.72 HG1.12
PD4: DD2.85 HG1.13 | length 122.4
  Bottom Layer w0.2: DD2.85 140.625,212.925 155.025,227.325 155.025,272.95 145.45,282.525 134.545,282.525 HG1.13
PD5: DD2.86 HG1.14 | length 124.9
  Bottom Layer w0.2: DD2.86 140.9,212.425 155.65,227.175 155.65,273.225 144.075,284.8 HG1.14